# EAGLE board MP3_Shield_Panel-v14 (EAGLE 6.5.0), part 1 of 3
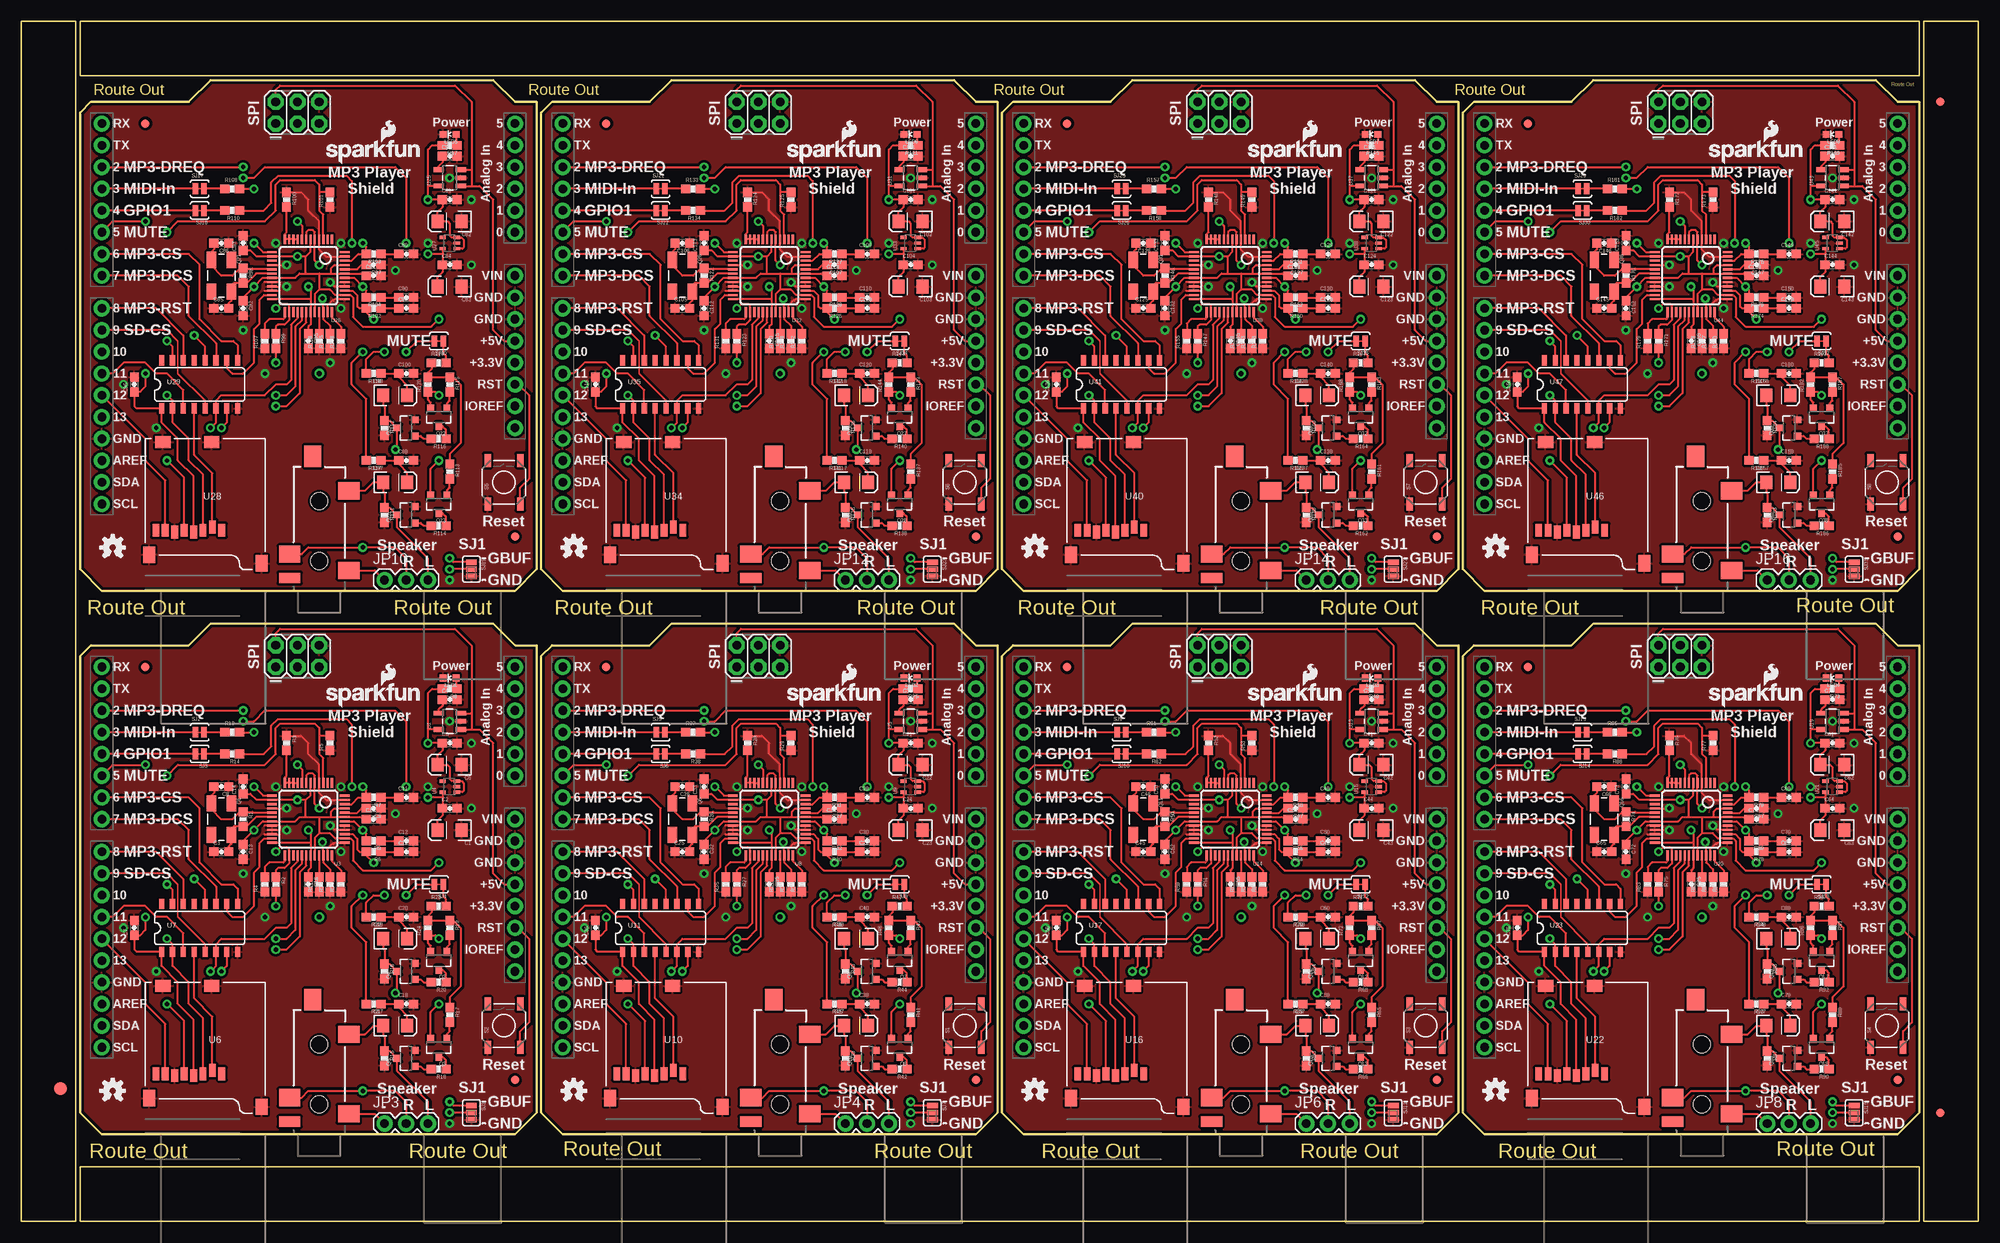
[diagram p0: board, top side]
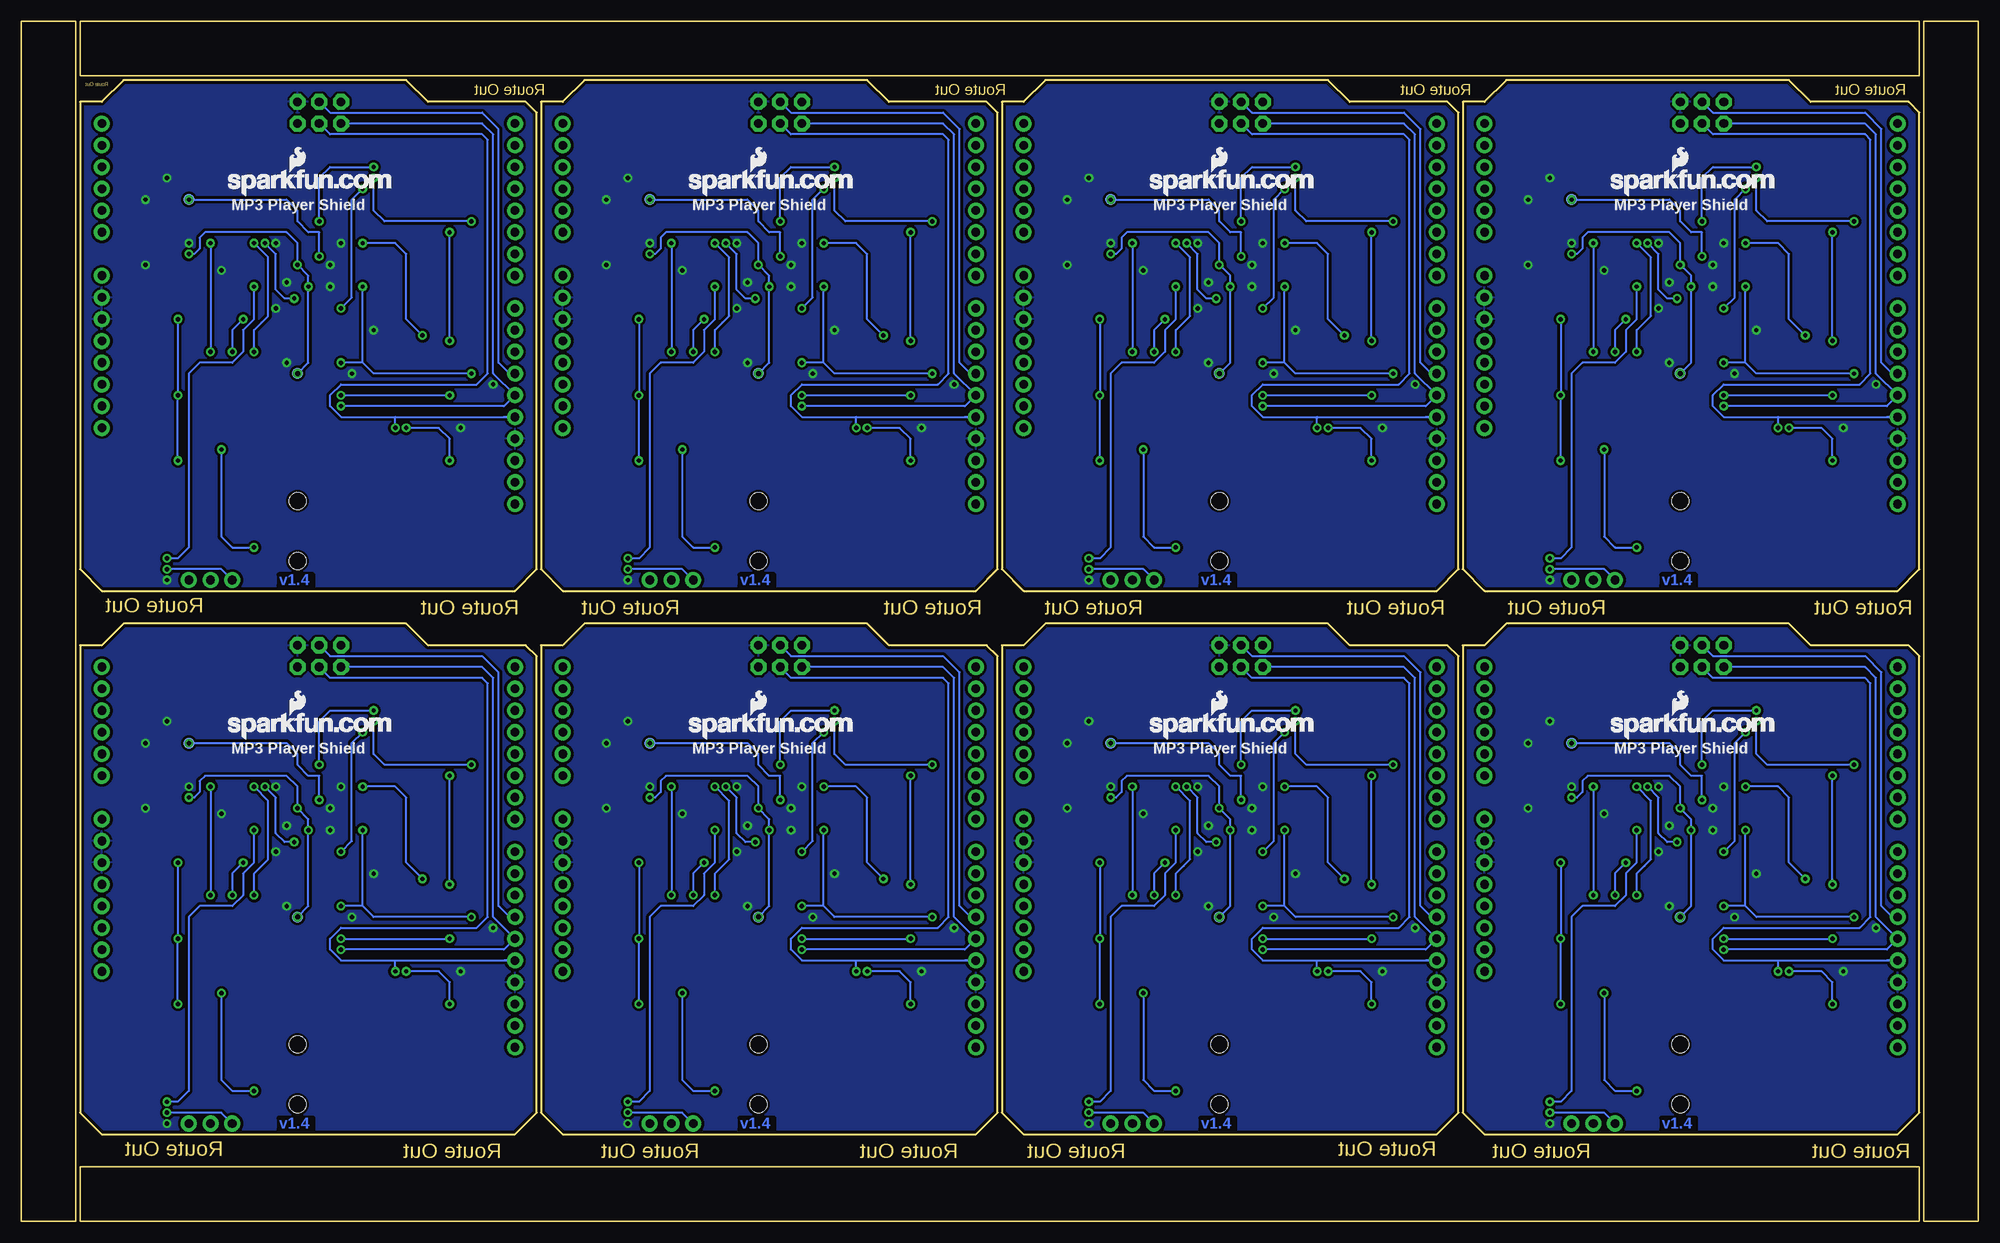
[diagram p1: board, bottom side, seen from below]

Size 228.6 x 140.21 mm. Coordinates in mm from the lower left corner, seen from the top.
Outline: 9.4,10.16 6.86,12.7 6.86,66.04 8.13,67.31 19.56,67.31 22.1,69.85 55.12,69.85 57.66,67.31 60.2,67.31 60.2,12.7 57.66,10.16 9.4,10.16
Outline: 63.25,10.16 60.71,12.7 60.71,66.04 61.98,67.31 73.41,67.31 75.95,69.85 108.97,69.85 111.51,67.31 114.05,67.31 114.05,12.7 111.51,10.16 63.25,10.16
Outline: 117.09,10.16 114.55,12.7 114.55,66.04 115.82,67.31 127.25,67.31 129.79,69.85 162.81,69.85 165.35,67.31 167.89,67.31 167.89,12.7 165.35,10.16 117.09,10.16
Outline: 170.94,10.16 168.4,12.7 168.4,66.04 169.67,67.31 181.1,67.31 183.64,69.85 216.66,69.85 219.2,67.31 221.74,67.31 221.74,12.7 219.2,10.16 170.94,10.16
Outline: 9.4,73.66 6.86,76.2 6.86,129.54 8.13,130.81 19.56,130.81 22.1,133.35 55.12,133.35 57.66,130.81 60.2,130.81 60.2,76.2 57.66,73.66 9.4,73.66
Outline: 63.25,73.66 60.71,76.2 60.71,129.54 61.98,130.81 73.41,130.81 75.95,133.35 108.97,133.35 111.51,130.81 114.05,130.81 114.05,76.2 111.51,73.66 63.25,73.66
Outline: 117.09,73.66 114.55,76.2 114.55,129.54 115.82,130.81 127.25,130.81 129.79,133.35 162.81,133.35 165.35,130.81 167.89,130.81 167.89,76.2 165.35,73.66 117.09,73.66
Outline: 170.94,73.66 168.4,76.2 168.4,129.54 169.67,130.81 181.1,130.81 183.64,133.35 216.66,133.35 219.2,130.81 221.74,130.81 221.74,76.2 219.2,73.66 170.94,73.66
Outline: 6.35,0 6.35,140.21 0,140.21 0,0 6.35,0
Outline: 6.86,6.35 6.86,0 221.74,0 221.74,6.35 6.86,6.35
Outline: 228.6,0 228.6,140.21 222.25,140.21 222.25,0 228.6,0
Outline: 221.74,133.86 221.74,140.21 6.86,140.21 6.86,133.86 221.74,133.86
Copper layers (1*16): Top 0.035mm / dielectric 1.5mm / Bottom 0.035mm
Design rules "SparkFun *": minimum track width 8mil, minimum drill 20mil, track to track 8mil, track to pad 8mil, pad to pad 8mil, via to via 8mil, smd to smd 8mil, copper to edge 10mil, drill to drill 8mil, minimum pad ring 12mil, minimum via ring 10mil, stop-mask expansion 4mil, vias tented up to drill 20mil, thermal gap 10mil

## Footprints (pad centres in the part's own frame; a part is rotated, then mirrored left to right if it is on the bottom)
EIA3216 = smd 1.4 x 1.6: A 1.4,0; C -1.4,0
0603-CAP = smd 1.1 x 1: 1 -0.85,0; 2 0.85,0
FIDUCIAL-1.5X3 = smd 1.5 x 1.5: 1 0,0
FIDUCIAL-1X2 = smd 1 x 1: 1 0,0
2X3 = drill 1.016 pad 1.88 octagon: 1 0,0; 2 0,2.54; 3 2.54,0; 4 2.54,2.54; 5 5.08,0; 6 5.08,2.54
AUDIO-JACK-3.5MM-SMD = smd 2 x 2.5: RING 4.3,3.45; SLEEVE 2.4,-3.45; TIP 11.7,-3.45 | smd 1.2 x 2.5: RSH 1.5,3.45 | smd 2.5 x 2: TSH 15.75,0.75 | hole 2: 3.5,0; 10.5,0
1X03 = drill 1.016 pad 1.88: 1 0,0; 2 2.54,0; 3 5.08,0
LED-0603 = smd 0.8 x 0.8: A 0,-0.75; C 0,0.75
CRYSTAL-SMD-5X3 = smd 1.9 x 1.1: 1 -1.85,-1.15; 2 1.85,-1.15; 3 1.85,1.15; 4 -1.85,1.15
SOT23-3 = smd 0.8 x 0.9: 1 -0.95,-1; 2 0.95,-1; 3 0,1.1
0603-RES = smd 1.1 x 1: 1 -0.85,0; 2 0.85,0
TACTILE_SWITCH_SMD = smd 1.524 x 0.762: 1 -2.54,1.905; 2 2.54,1.905; 3 -2.54,-1.905; 4 2.54,-1.905
SJ_3_PASTE2&3 = smd 0.635 x 1.27: 1 -0.813,0; 2 0,0; 3 0.813,0
SJ_2S-TRACE = smd 0.635 x 1.27: 1 -0.508,0; 2 0.508,0
PAD.03X.05 = smd 1.27 x 1.27: P$1 0,0
SOT23-5 = smd 0.55 x 1.2: 1 -0.95,-1.3; 2 0,-1.3; 3 0.95,-1.3; 4 0.95,1.3; 5 -0.95,1.3
UNO_R3_SHIELD = drill 1.016 pad 1.88: 3.3V 50.8,26.67; 5V 50.8,29.21; A0 50.8,41.91; A1 50.8,44.45; A2 50.8,46.99; A3 50.8,49.53; A4 50.8,52.07; A5 50.8,54.61; AREF 2.54,15.24; D2 2.54,49.53; D3 2.54,46.99; D4 2.54,44.45; D5 2.54,41.91; D6 2.54,39.37; D7 2.54,36.83; D8 2.54,33.02; D9 2.54,30.48; D10 2.54,27.94; D11 2.54,25.4; D12 2.54,22.86; D13 2.54,20.32; GND@0 50.8,31.75; GND@1 50.8,34.29; GND@2 2.54,17.78; IOREF 50.8,21.59; NC 50.8,19.05; RES 50.8,24.13; RX 2.54,54.61; SCL 2.54,10.16; SDA 2.54,12.7; TX 2.54,52.07; VIN 50.8,36.83
LQFP-48 = smd 0.254 x 1.143: 1 -2.75,-4.25; 2 -2.25,-4.25; 3 -1.75,-4.25; 4 -1.25,-4.25; 5 -0.75,-4.25; 6 -0.25,-4.25; 7 0.25,-4.25; 8 0.75,-4.25; 9 1.25,-4.25; 10 1.75,-4.25; 11 2.25,-4.25; 12 2.75,-4.25; 25 2.75,4.25; 26 2.25,4.25; 27 1.75,4.25; 28 1.25,4.25; 29 0.75,4.25; 30 0.25,4.25; 31 -0.25,4.25; 32 -0.75,4.25; 33 -1.25,4.25; 34 -1.75,4.25; 35 -2.25,4.25; 36 -2.75,4.25 | smd 1.143 x 0.254: 13 4.25,-2.75; 14 4.25,-2.25; 15 4.25,-1.75; 16 4.25,-1.25; 17 4.25,-0.75; 18 4.25,-0.25; 19 4.25,0.25; 20 4.25,0.75; 21 4.25,1.25; 22 4.25,1.75; 23 4.25,2.25; 24 4.25,2.75; 37 -4.25,2.75; 38 -4.25,2.25; 39 -4.25,1.75; 40 -4.25,1.25; 41 -4.25,0.75; 42 -4.25,0.25; 43 -4.25,-0.25; 44 -4.25,-0.75; 45 -4.25,-1.25; 46 -4.25,-1.75; 47 -4.25,-2.25; 48 -4.25,-2.75
SC70 = smd 0.4 x 0.75: 1 -0.65,-0.825; 2 0,-0.825; 3 0.65,-0.825; 4 0.65,0.825; 5 -0.65,0.825
MICRO-SD-SOCKET-PP = smd 0.8 x 1.5: 1 -8.94,10.7; 2 -7.84,10.3; 3 -6.74,10.7; 4 -5.64,10.9; 5 -4.54,10.7; 6 -3.44,10.9; 7 -2.34,10.7; 8 -1.24,10.7 | smd 1.8 x 1.4: CD1 -2.05,0.4; CD2 -7.75,0.4 | smd 1.4 x 1.9: GND1 -13.6,14.55; GND3 -0.45,13.55
SO016 = smd 0.6 x 1.2: 1 -4.445,-2.8; 2 -3.175,-2.8; 3 -1.905,-2.8; 4 -0.635,-2.8; 5 0.635,-2.8; 6 1.905,-2.8; 7 3.175,-2.8; 8 4.445,-2.8; 9 4.445,2.8; 10 3.175,2.8; 11 1.905,2.8; 12 0.635,2.8; 13 -0.635,2.8; 14 -1.905,2.8; 15 -3.175,2.8; 16 -4.445,2.8

## Placement (x,y rotation side)
C1  10uF  [EIA3216]  50.04,45.72 180 top
C2  0.1uF  [0603-CAP]  50.04,48.26 0 top
C3  22pF  [0603-CAP]  23.37,43.18 0 top
C4  470pF  [0603-CAP]  50.04,60.96 0 top
C5  0.1uF  [0603-CAP]  50.04,55.88 0 top
C6  10uF  [EIA3216]  50.04,53.34 180 top
C7  0.1uF  [0603-CAP]  13.21,34.29 90 top
C8  22pF  [0603-CAP]  23.37,50.8 180 top
C9  1.0uF  [0603-CAP]  41.15,48.26 180 top
C10  10nF  [0603-CAP]  44.96,43.18 0 top
C11  10nF  [0603-CAP]  44.96,49.53 0 top
C12  47nF  [0603-CAP]  44.96,44.45 0 top
C13  0.1uF  [0603-CAP]  25.91,43.18 270 top
C14  0.1uF  [0603-CAP]  25.91,50.8 90 top
C15  0.1uF  [0603-CAP]  41.15,46.99 0 top
C16  0.1uF  [0603-CAP]  33.53,39.37 270 top
C17  10uF  [EIA3216]  43.69,22.86 0 top
C18  10uF  [EIA3216]  43.69,33.02 0 top
C19  3.3nF  [0603-CAP]  44.96,25.4 0 top
C20  3.3nF  [0603-CAP]  44.96,35.56 0 top
C21  0.1uF  [0603-CAP]  103.89,55.88 0 top
C22  10uF  [EIA3216]  103.89,53.34 180 top
C23  10uF  [EIA3216]  103.89,45.72 180 top
C24  0.1uF  [0603-CAP]  103.89,48.26 0 top
C25  22pF  [0603-CAP]  77.22,43.18 0 top
C26  22pF  [0603-CAP]  77.22,50.8 180 top
C27  1.0uF  [0603-CAP]  95,48.26 180 top
C28  10nF  [0603-CAP]  98.81,43.18 0 top
C29  10nF  [0603-CAP]  98.81,49.53 0 top
C30  47nF  [0603-CAP]  98.81,44.45 0 top
C31  470pF  [0603-CAP]  103.89,60.96 0 top
C32  0.1uF  [0603-CAP]  79.76,43.18 270 top
C33  0.1uF  [0603-CAP]  79.76,50.8 90 top
C34  0.1uF  [0603-CAP]  95,46.99 0 top
C35  0.1uF  [0603-CAP]  87.38,39.37 270 top
C36  0.1uF  [0603-CAP]  67.06,34.29 90 top
C37  10uF  [EIA3216]  97.54,22.86 0 top
C38  10uF  [EIA3216]  97.54,33.02 0 top
C39  3.3nF  [0603-CAP]  98.81,25.4 0 top
C40  3.3nF  [0603-CAP]  98.81,35.56 0 top
C41  0.1uF  [0603-CAP]  157.73,55.88 0 top
C42  10uF  [EIA3216]  157.73,53.34 180 top
C43  10uF  [EIA3216]  157.73,45.72 180 top
C44  0.1uF  [0603-CAP]  157.73,48.26 0 top
C45  22pF  [0603-CAP]  131.06,43.18 0 top
C46  22pF  [0603-CAP]  131.06,50.8 180 top
C47  1.0uF  [0603-CAP]  148.84,48.26 180 top
C48  10nF  [0603-CAP]  152.65,43.18 0 top
C49  10nF  [0603-CAP]  152.65,49.53 0 top
C50  47nF  [0603-CAP]  152.65,44.45 0 top
C51  470pF  [0603-CAP]  157.73,60.96 0 top
C52  0.1uF  [0603-CAP]  133.6,43.18 270 top
C53  0.1uF  [0603-CAP]  133.6,50.8 90 top
C54  0.1uF  [0603-CAP]  148.84,46.99 0 top
C55  0.1uF  [0603-CAP]  141.22,39.37 270 top
C56  0.1uF  [0603-CAP]  120.9,34.29 90 top
C57  10uF  [EIA3216]  151.38,22.86 0 top
C58  10uF  [EIA3216]  151.38,33.02 0 top
C59  3.3nF  [0603-CAP]  152.65,25.4 0 top
C60  3.3nF  [0603-CAP]  152.65,35.56 0 top
C61  0.1uF  [0603-CAP]  211.58,55.88 0 top
C62  10uF  [EIA3216]  211.58,53.34 180 top
C63  10uF  [EIA3216]  211.58,45.72 180 top
C64  0.1uF  [0603-CAP]  211.58,48.26 0 top
C65  22pF  [0603-CAP]  184.91,43.18 0 top
C66  22pF  [0603-CAP]  184.91,50.8 180 top
C67  1.0uF  [0603-CAP]  202.69,48.26 180 top
C68  10nF  [0603-CAP]  206.5,43.18 0 top
C69  10nF  [0603-CAP]  206.5,49.53 0 top
C70  47nF  [0603-CAP]  206.5,44.45 0 top
C71  470pF  [0603-CAP]  211.58,60.96 0 top
C72  0.1uF  [0603-CAP]  187.45,43.18 270 top
C73  0.1uF  [0603-CAP]  187.45,50.8 90 top
C74  0.1uF  [0603-CAP]  202.69,46.99 0 top
C75  0.1uF  [0603-CAP]  195.07,39.37 270 top
C76  0.1uF  [0603-CAP]  174.75,34.29 90 top
C77  10uF  [EIA3216]  205.23,22.86 0 top
C78  10uF  [EIA3216]  205.23,33.02 0 top
C79  3.3nF  [0603-CAP]  206.5,25.4 0 top
C80  3.3nF  [0603-CAP]  206.5,35.56 0 top
C81  0.1uF  [0603-CAP]  50.04,119.38 0 top
C82  10uF  [EIA3216]  50.04,116.84 180 top
C83  10uF  [EIA3216]  50.04,109.22 180 top
C84  0.1uF  [0603-CAP]  50.04,111.76 0 top
C85  22pF  [0603-CAP]  23.37,106.68 0 top
C86  22pF  [0603-CAP]  23.37,114.3 180 top
C87  1.0uF  [0603-CAP]  41.15,111.76 180 top
C88  10nF  [0603-CAP]  44.96,106.68 0 top
C89  10nF  [0603-CAP]  44.96,113.03 0 top
C90  47nF  [0603-CAP]  44.96,107.95 0 top
C91  470pF  [0603-CAP]  50.04,124.46 0 top
C92  0.1uF  [0603-CAP]  25.91,106.68 270 top
C93  0.1uF  [0603-CAP]  25.91,114.3 90 top
C94  0.1uF  [0603-CAP]  41.15,110.49 0 top
C95  0.1uF  [0603-CAP]  33.53,102.87 270 top
C96  0.1uF  [0603-CAP]  13.21,97.79 90 top
C97  10uF  [EIA3216]  43.69,86.36 0 top
C98  10uF  [EIA3216]  43.69,96.52 0 top
C99  3.3nF  [0603-CAP]  44.96,88.9 0 top
C100  3.3nF  [0603-CAP]  44.96,99.06 0 top
C101  0.1uF  [0603-CAP]  103.89,119.38 0 top
C102  10uF  [EIA3216]  103.89,116.84 180 top
C103  10uF  [EIA3216]  103.89,109.22 180 top
C104  0.1uF  [0603-CAP]  103.89,111.76 0 top
C105  22pF  [0603-CAP]  77.22,106.68 0 top
C106  22pF  [0603-CAP]  77.22,114.3 180 top
C107  1.0uF  [0603-CAP]  95,111.76 180 top
C108  10nF  [0603-CAP]  98.81,106.68 0 top
C109  10nF  [0603-CAP]  98.81,113.03 0 top
C110  47nF  [0603-CAP]  98.81,107.95 0 top
C111  470pF  [0603-CAP]  103.89,124.46 0 top
C112  0.1uF  [0603-CAP]  79.76,106.68 270 top
C113  0.1uF  [0603-CAP]  79.76,114.3 90 top
C114  0.1uF  [0603-CAP]  95,110.49 0 top
C115  0.1uF  [0603-CAP]  87.38,102.87 270 top
C116  0.1uF  [0603-CAP]  67.06,97.79 90 top
C117  10uF  [EIA3216]  97.54,86.36 0 top
C118  10uF  [EIA3216]  97.54,96.52 0 top
C119  3.3nF  [0603-CAP]  98.81,88.9 0 top
C120  3.3nF  [0603-CAP]  98.81,99.06 0 top
C121  0.1uF  [0603-CAP]  157.73,119.38 0 top
C122  10uF  [EIA3216]  157.73,116.84 180 top
C123  10uF  [EIA3216]  157.73,109.22 180 top
C124  0.1uF  [0603-CAP]  157.73,111.76 0 top
C125  22pF  [0603-CAP]  131.06,106.68 0 top
C126  22pF  [0603-CAP]  131.06,114.3 180 top
C127  1.0uF  [0603-CAP]  148.84,111.76 180 top
C128  10nF  [0603-CAP]  152.65,106.68 0 top
C129  10nF  [0603-CAP]  152.65,113.03 0 top
C130  47nF  [0603-CAP]  152.65,107.95 0 top
C131  470pF  [0603-CAP]  157.73,124.46 0 top
C132  0.1uF  [0603-CAP]  133.6,106.68 270 top
C133  0.1uF  [0603-CAP]  133.6,114.3 90 top
C134  0.1uF  [0603-CAP]  148.84,110.49 0 top
C135  0.1uF  [0603-CAP]  141.22,102.87 270 top
C136  0.1uF  [0603-CAP]  120.9,97.79 90 top
C137  10uF  [EIA3216]  151.38,86.36 0 top
C138  10uF  [EIA3216]  151.38,96.52 0 top
C139  3.3nF  [0603-CAP]  152.65,88.9 0 top
C140  3.3nF  [0603-CAP]  152.65,99.06 0 top
C141  0.1uF  [0603-CAP]  211.58,119.38 0 top
C142  10uF  [EIA3216]  211.58,116.84 180 top
C143  10uF  [EIA3216]  211.58,109.22 180 top
C144  0.1uF  [0603-CAP]  211.58,111.76 0 top
C145  22pF  [0603-CAP]  184.91,106.68 0 top
C146  22pF  [0603-CAP]  184.91,114.3 180 top
C147  1.0uF  [0603-CAP]  202.69,111.76 180 top
C148  10nF  [0603-CAP]  206.5,106.68 0 top
C149  10nF  [0603-CAP]  206.5,113.03 0 top
C150  47nF  [0603-CAP]  206.5,107.95 0 top
C151  470pF  [0603-CAP]  211.58,124.46 0 top
C152  0.1uF  [0603-CAP]  187.45,106.68 270 top
C153  0.1uF  [0603-CAP]  187.45,114.3 90 top
C154  0.1uF  [0603-CAP]  202.69,110.49 0 top
C155  0.1uF  [0603-CAP]  195.07,102.87 270 top
C156  0.1uF  [0603-CAP]  174.75,97.79 90 top
C157  10uF  [EIA3216]  205.23,86.36 0 top
C158  10uF  [EIA3216]  205.23,96.52 0 top
C159  3.3nF  [0603-CAP]  206.5,88.9 0 top
C160  3.3nF  [0603-CAP]  206.5,99.06 0 top
E$1  [FIDUCIAL-1.5X3]  4.57,15.49 0 top
E$4  [FIDUCIAL-1X2]  224.16,12.7 0 top
E$5  [FIDUCIAL-1X2]  224.16,130.81 180 top
J1  ISP/SPI  [2X3]  29.72,64.77 0 top
J2  ISP/SPI  [2X3]  83.57,64.77 0 top
J3  ISP/SPI  [2X3]  137.41,64.77 0 top
J4  ISP/SPI  [2X3]  191.26,64.77 0 top
J5  ISP/SPI  [2X3]  29.72,128.27 0 top
J6  ISP/SPI  [2X3]  83.57,128.27 0 top
J7  ISP/SPI  [2X3]  137.41,128.27 0 top
J8  ISP/SPI  [2X3]  191.26,128.27 0 top
JP1  [AUDIO-JACK-3.5MM-SMD]  34.8,10.16 90 top
JP2  [AUDIO-JACK-3.5MM-SMD]  88.65,10.16 90 top
JP3  Optional  [1X03]  42.42,11.43 0 top
JP4  Optional  [1X03]  96.27,11.43 0 top
JP5  [AUDIO-JACK-3.5MM-SMD]  142.49,10.16 90 top
JP6  Optional  [1X03]  150.11,11.43 0 top
JP7  [AUDIO-JACK-3.5MM-SMD]  196.34,10.16 90 top
JP8  Optional  [1X03]  203.96,11.43 0 top
JP9  [AUDIO-JACK-3.5MM-SMD]  34.8,73.66 90 top
JP10  Optional  [1X03]  42.42,74.93 0 top
JP11  [AUDIO-JACK-3.5MM-SMD]  88.65,73.66 90 top
JP12  Optional  [1X03]  96.27,74.93 0 top
JP13  [AUDIO-JACK-3.5MM-SMD]  142.49,73.66 90 top
JP14  Optional  [1X03]  150.11,74.93 0 top
JP15  [AUDIO-JACK-3.5MM-SMD]  196.34,73.66 90 top
JP16  Optional  [1X03]  203.96,74.93 0 top
LED1  Power  [LED-0603]  50.04,63.5 90 top
LED2  Power  [LED-0603]  103.89,63.5 90 top
LED3  Power  [LED-0603]  157.73,63.5 90 top
LED4  Power  [LED-0603]  211.58,63.5 90 top
LED5  Power  [LED-0603]  50.04,127 90 top
LED6  Power  [LED-0603]  103.89,127 90 top
LED7  Power  [LED-0603]  157.73,127 90 top
LED8  Power  [LED-0603]  211.58,127 90 top
LOGO1  OSHW-LOGOS  [OSHW-LOGO-S]  10.67,15.24 0 top
LOGO2  SFE_LOGO_NAME_FLAME.1_INCH  [SFE_LOGO_NAME_FLAME_.1]  35.18,59.94 0 top
LOGO3  OSHW-LOGOS  [OSHW-LOGO-S]  64.52,15.24 0 top
LOGO4  SFE_LOGO_NAME_FLAME.1_INCH  [SFE_LOGO_NAME_FLAME_.1]  89.03,59.94 0 top
LOGO5  OSHW-LOGOS  [OSHW-LOGO-S]  118.36,15.24 0 top
LOGO6  SFE_LOGO_NAME_FLAME.1_INCH  [SFE_LOGO_NAME_FLAME_.1]  142.88,59.94 0 top
LOGO7  OSHW-LOGOS  [OSHW-LOGO-S]  172.21,15.24 0 top
LOGO8  SFE_LOGO_NAME_FLAME.1_INCH  [SFE_LOGO_NAME_FLAME_.1]  196.72,59.94 0 top
LOGO9  OSHW-LOGOS  [OSHW-LOGO-S]  10.67,78.74 0 top
LOGO10  SFE_LOGO_NAME_FLAME.1_INCH  [SFE_LOGO_NAME_FLAME_.1]  35.18,123.44 0 top
LOGO11  OSHW-LOGOS  [OSHW-LOGO-S]  64.52,78.74 0 top
LOGO12  SFE_LOGO_NAME_FLAME.1_INCH  [SFE_LOGO_NAME_FLAME_.1]  89.03,123.44 0 top
LOGO13  OSHW-LOGOS  [OSHW-LOGO-S]  118.36,78.74 0 top
LOGO14  SFE_LOGO_NAME_FLAME.1_INCH  [SFE_LOGO_NAME_FLAME_.1]  142.88,123.44 0 top
LOGO15  OSHW-LOGOS  [OSHW-LOGO-S]  172.21,78.74 0 top
LOGO16  SFE_LOGO_NAME_FLAME.1_INCH  [SFE_LOGO_NAME_FLAME_.1]  196.72,123.44 0 top
Q1  12.288MHz  [CRYSTAL-SMD-5X3]  23.37,46.99 270 top
Q2  PMBT3906  [SOT23-3]  48.77,30.48 180 top
Q3  PMBT3906  [SOT23-3]  48.77,20.32 180 top
Q4  MMBT2222A  [SOT23-3]  44.96,29.21 90 top
Q5  MMBT2222A  [SOT23-3]  44.96,19.05 90 top
Q6  12.288MHz  [CRYSTAL-SMD-5X3]  77.22,46.99 270 top
Q7  PMBT3906  [SOT23-3]  102.62,30.48 180 top
Q8  PMBT3906  [SOT23-3]  102.62,20.32 180 top
Q9  MMBT2222A  [SOT23-3]  98.81,29.21 90 top
Q10  MMBT2222A  [SOT23-3]  98.81,19.05 90 top
Q11  12.288MHz  [CRYSTAL-SMD-5X3]  131.06,46.99 270 top
Q12  PMBT3906  [SOT23-3]  156.46,30.48 180 top
Q13  PMBT3906  [SOT23-3]  156.46,20.32 180 top
Q14  MMBT2222A  [SOT23-3]  152.65,29.21 90 top
Q15  MMBT2222A  [SOT23-3]  152.65,19.05 90 top
Q16  12.288MHz  [CRYSTAL-SMD-5X3]  184.91,46.99 270 top
Q17  PMBT3906  [SOT23-3]  210.31,30.48 180 top
Q18  PMBT3906  [SOT23-3]  210.31,20.32 180 top
Q19  MMBT2222A  [SOT23-3]  206.5,29.21 90 top
Q20  MMBT2222A  [SOT23-3]  206.5,19.05 90 top
Q21  12.288MHz  [CRYSTAL-SMD-5X3]  23.37,110.49 270 top
Q22  PMBT3906  [SOT23-3]  48.77,93.98 180 top
Q23  PMBT3906  [SOT23-3]  48.77,83.82 180 top
Q24  MMBT2222A  [SOT23-3]  44.96,92.71 90 top
Q25  MMBT2222A  [SOT23-3]  44.96,82.55 90 top
Q26  12.288MHz  [CRYSTAL-SMD-5X3]  77.22,110.49 270 top
Q27  PMBT3906  [SOT23-3]  102.62,93.98 180 top
Q28  PMBT3906  [SOT23-3]  102.62,83.82 180 top
Q29  MMBT2222A  [SOT23-3]  98.81,92.71 90 top
Q30  MMBT2222A  [SOT23-3]  98.81,82.55 90 top
Q31  12.288MHz  [CRYSTAL-SMD-5X3]  131.06,110.49 270 top
Q32  PMBT3906  [SOT23-3]  156.46,93.98 180 top
Q33  PMBT3906  [SOT23-3]  156.46,83.82 180 top
Q34  MMBT2222A  [SOT23-3]  152.65,92.71 90 top
Q35  MMBT2222A  [SOT23-3]  152.65,82.55 90 top
Q36  12.288MHz  [CRYSTAL-SMD-5X3]  184.91,110.49 270 top
Q37  PMBT3906  [SOT23-3]  210.31,93.98 180 top
Q38  PMBT3906  [SOT23-3]  210.31,83.82 180 top
Q39  MMBT2222A  [SOT23-3]  206.5,92.71 90 top
Q40  MMBT2222A  [SOT23-3]  206.5,82.55 90 top
R1  1M  [0603-RES]  25.91,46.99 270 top
R2  100k  [0603-RES]  29.72,39.37 270 top
R3  100k  [0603-RES]  30.99,55.88 270 top
R4  100k  [0603-RES]  28.45,39.37 90 top
R5  100k  [0603-RES]  36.07,55.88 90 top
R6  20  [0603-RES]  41.15,43.18 180 top
R7  20  [0603-RES]  41.15,49.53 180 top
R8  330  [0603-RES]  50.04,62.23 180 top
R9  10  [0603-RES]  41.15,44.45 180 top
R10  100k  [0603-RES]  36.07,39.37 90 top
R11  100k  [0603-RES]  34.8,39.37 90 top
R12  100k  [0603-RES]  37.34,39.37 90 top
R13  1K  [0603-RES]  24.64,57.15 0 top
R14  1K  [0603-RES]  24.64,54.61 180 top
R15  10K  [0603-RES]  42.42,19.05 270 top
R16  10K  [0603-RES]  42.42,29.21 270 top
R17  10K  [0603-RES]  50.04,24.13 270 top
R18  10K  [0603-RES]  48.77,17.78 180 top
R19  10K  [0603-RES]  50.04,34.29 270 top
R20  10K  [0603-RES]  48.77,27.94 180 top
R21  470  [0603-RES]  41.15,25.4 180 top
R22  470  [0603-RES]  41.15,35.56 180 top
R23  1K  [0603-RES]  48.77,36.83 0 top
R24  100K  [0603-RES]  47.5,34.29 90 top
R25  330  [0603-RES]  103.89,62.23 180 top
R26  1M  [0603-RES]  79.76,46.99 270 top
R27  100k  [0603-RES]  83.57,39.37 270 top
R28  100k  [0603-RES]  84.84,55.88 270 top
R29  100k  [0603-RES]  89.92,55.88 90 top
R30  20  [0603-RES]  95,43.18 180 top
R31  20  [0603-RES]  95,49.53 180 top
R32  10  [0603-RES]  95,44.45 180 top
R33  100k  [0603-RES]  89.92,39.37 90 top
R34  100k  [0603-RES]  88.65,39.37 90 top
R35  100k  [0603-RES]  82.3,39.37 90 top
R36  100k  [0603-RES]  91.19,39.37 90 top
R37  1K  [0603-RES]  78.49,57.15 0 top
R38  1K  [0603-RES]  78.49,54.61 180 top
R39  10K  [0603-RES]  96.27,19.05 270 top
R40  10K  [0603-RES]  96.27,29.21 270 top
R41  10K  [0603-RES]  103.89,24.13 270 top
R42  10K  [0603-RES]  102.62,17.78 180 top
R43  10K  [0603-RES]  103.89,34.29 270 top
R44  10K  [0603-RES]  102.62,27.94 180 top
R45  470  [0603-RES]  95,25.4 180 top
R46  470  [0603-RES]  95,35.56 180 top
R47  1K  [0603-RES]  102.62,36.83 0 top
R48  100K  [0603-RES]  101.35,34.29 90 top
R49  330  [0603-RES]  157.73,62.23 180 top
R50  1M  [0603-RES]  133.6,46.99 270 top
R51  100k  [0603-RES]  137.41,39.37 270 top
R52  100k  [0603-RES]  138.68,55.88 270 top
R53  100k  [0603-RES]  143.76,55.88 90 top
R54  20  [0603-RES]  148.84,43.18 180 top
R55  20  [0603-RES]  148.84,49.53 180 top
R56  10  [0603-RES]  148.84,44.45 180 top
R57  100k  [0603-RES]  143.76,39.37 90 top
R58  100k  [0603-RES]  142.49,39.37 90 top
R59  100k  [0603-RES]  136.14,39.37 90 top
R60  100k  [0603-RES]  145.03,39.37 90 top
R61  1K  [0603-RES]  132.33,57.15 0 top
R62  1K  [0603-RES]  132.33,54.61 180 top
R63  10K  [0603-RES]  150.11,19.05 270 top
R64  10K  [0603-RES]  150.11,29.21 270 top
R65  10K  [0603-RES]  157.73,24.13 270 top
R66  10K  [0603-RES]  156.46,17.78 180 top
R67  10K  [0603-RES]  157.73,34.29 270 top
R68  10K  [0603-RES]  156.46,27.94 180 top
R69  470  [0603-RES]  148.84,25.4 180 top
R70  470  [0603-RES]  148.84,35.56 180 top
R71  1K  [0603-RES]  156.46,36.83 0 top
R72  100K  [0603-RES]  155.19,34.29 90 top
R73  330  [0603-RES]  211.58,62.23 180 top
R74  1M  [0603-RES]  187.45,46.99 270 top
R75  100k  [0603-RES]  191.26,39.37 270 top
R76  100k  [0603-RES]  192.53,55.88 270 top
R77  100k  [0603-RES]  197.61,55.88 90 top
R78  20  [0603-RES]  202.69,43.18 180 top
R79  20  [0603-RES]  202.69,49.53 180 top
R80  10  [0603-RES]  202.69,44.45 180 top
R81  100k  [0603-RES]  197.61,39.37 90 top
R82  100k  [0603-RES]  196.34,39.37 90 top
R83  100k  [0603-RES]  189.99,39.37 90 top
R84  100k  [0603-RES]  198.88,39.37 90 top
R85  1K  [0603-RES]  186.18,57.15 0 top
R86  1K  [0603-RES]  186.18,54.61 180 top
R87  10K  [0603-RES]  203.96,19.05 270 top
R88  10K  [0603-RES]  203.96,29.21 270 top
R89  10K  [0603-RES]  211.58,24.13 270 top
R90  10K  [0603-RES]  210.31,17.78 180 top
R91  10K  [0603-RES]  211.58,34.29 270 top
R92  10K  [0603-RES]  210.31,27.94 180 top
R93  470  [0603-RES]  202.69,25.4 180 top
R94  470  [0603-RES]  202.69,35.56 180 top
R95  1K  [0603-RES]  210.31,36.83 0 top
R96  100K  [0603-RES]  209.04,34.29 90 top
R97  330  [0603-RES]  50.04,125.73 180 top
R98  1M  [0603-RES]  25.91,110.49 270 top
R99  100k  [0603-RES]  29.72,102.87 270 top
R100  100k  [0603-RES]  30.99,119.38 270 top
R101  100k  [0603-RES]  36.07,119.38 90 top
R102  20  [0603-RES]  41.15,106.68 180 top
R103  20  [0603-RES]  41.15,113.03 180 top
R104  10  [0603-RES]  41.15,107.95 180 top
R105  100k  [0603-RES]  36.07,102.87 90 top
R106  100k  [0603-RES]  34.8,102.87 90 top
R107  100k  [0603-RES]  28.45,102.87 90 top
R108  100k  [0603-RES]  37.34,102.87 90 top
R109  1K  [0603-RES]  24.64,120.65 0 top
R110  1K  [0603-RES]  24.64,118.11 180 top
R111  10K  [0603-RES]  42.42,82.55 270 top
R112  10K  [0603-RES]  42.42,92.71 270 top
R113  10K  [0603-RES]  50.04,87.63 270 top
R114  10K  [0603-RES]  48.77,81.28 180 top
R115  10K  [0603-RES]  50.04,97.79 270 top
R116  10K  [0603-RES]  48.77,91.44 180 top
R117  470  [0603-RES]  41.15,88.9 180 top
R118  470  [0603-RES]  41.15,99.06 180 top
R119  1K  [0603-RES]  48.77,100.33 0 top
R120  100K  [0603-RES]  47.5,97.79 90 top
R121  330  [0603-RES]  103.89,125.73 180 top
R122  1M  [0603-RES]  79.76,110.49 270 top
R123  100k  [0603-RES]  83.57,102.87 270 top
R124  100k  [0603-RES]  84.84,119.38 270 top
R125  100k  [0603-RES]  89.92,119.38 90 top
R126  20  [0603-RES]  95,106.68 180 top
R127  20  [0603-RES]  95,113.03 180 top
R128  10  [0603-RES]  95,107.95 180 top
R129  100k  [0603-RES]  89.92,102.87 90 top
R130  100k  [0603-RES]  88.65,102.87 90 top
R131  100k  [0603-RES]  82.3,102.87 90 top
R132  100k  [0603-RES]  91.19,102.87 90 top
R133  1K  [0603-RES]  78.49,120.65 0 top
R134  1K  [0603-RES]  78.49,118.11 180 top
R135  10K  [0603-RES]  96.27,82.55 270 top
R136  10K  [0603-RES]  96.27,92.71 270 top
R137  10K  [0603-RES]  103.89,87.63 270 top
R138  10K  [0603-RES]  102.62,81.28 180 top
R139  10K  [0603-RES]  103.89,97.79 270 top
R140  10K  [0603-RES]  102.62,91.44 180 top
R141  470  [0603-RES]  95,88.9 180 top
R142  470  [0603-RES]  95,99.06 180 top
R143  1K  [0603-RES]  102.62,100.33 0 top
R144  100K  [0603-RES]  101.35,97.79 90 top
R145  330  [0603-RES]  157.73,125.73 180 top
R146  1M  [0603-RES]  133.6,110.49 270 top
R147  100k  [0603-RES]  137.41,102.87 270 top
R148  100k  [0603-RES]  138.68,119.38 270 top
R149  100k  [0603-RES]  143.76,119.38 90 top
R150  20  [0603-RES]  148.84,106.68 180 top
R151  20  [0603-RES]  148.84,113.03 180 top
R152  10  [0603-RES]  148.84,107.95 180 top
R153  100k  [0603-RES]  143.76,102.87 90 top
R154  100k  [0603-RES]  142.49,102.87 90 top
R155  100k  [0603-RES]  136.14,102.87 90 top
R156  100k  [0603-RES]  145.03,102.87 90 top
R157  1K  [0603-RES]  132.33,120.65 0 top
R158  1K  [0603-RES]  132.33,118.11 180 top
R159  10K  [0603-RES]  150.11,82.55 270 top
R160  10K  [0603-RES]  150.11,92.71 270 top
R161  10K  [0603-RES]  157.73,87.63 270 top
R162  10K  [0603-RES]  156.46,81.28 180 top
R163  10K  [0603-RES]  157.73,97.79 270 top
R164  10K  [0603-RES]  156.46,91.44 180 top
R165  470  [0603-RES]  148.84,88.9 180 top
R166  470  [0603-RES]  148.84,99.06 180 top
R167  1K  [0603-RES]  156.46,100.33 0 top
R168  100K  [0603-RES]  155.19,97.79 90 top
R169  330  [0603-RES]  211.58,125.73 180 top
R170  1M  [0603-RES]  187.45,110.49 270 top
R171  100k  [0603-RES]  191.26,102.87 270 top
R172  100k  [0603-RES]  192.53,119.38 270 top
R173  100k  [0603-RES]  197.61,119.38 90 top
R174  20  [0603-RES]  202.69,106.68 180 top
R175  20  [0603-RES]  202.69,113.03 180 top
R176  10  [0603-RES]  202.69,107.95 180 top
R177  100k  [0603-RES]  197.61,102.87 90 top
R178  100k  [0603-RES]  196.34,102.87 90 top
R179  100k  [0603-RES]  189.99,102.87 90 top
R180  100k  [0603-RES]  198.88,102.87 90 top
R181  1K  [0603-RES]  186.18,120.65 0 top
R182  1K  [0603-RES]  186.18,118.11 180 top
R183  10K  [0603-RES]  203.96,82.55 270 top
R184  10K  [0603-RES]  203.96,92.71 270 top
R185  10K  [0603-RES]  211.58,87.63 270 top
R186  10K  [0603-RES]  210.31,81.28 180 top
R187  10K  [0603-RES]  211.58,97.79 270 top
R188  10K  [0603-RES]  210.31,91.44 180 top
R189  470  [0603-RES]  202.69,88.9 180 top
R190  470  [0603-RES]  202.69,99.06 180 top
R191  1K  [0603-RES]  210.31,100.33 0 top
R192  100K  [0603-RES]  209.04,97.79 90 top
S1  Reset  [TACTILE_SWITCH_SMD]  110.24,22.86 90 top
S2  Reset  [TACTILE_SWITCH_SMD]  56.39,22.86 90 top
S3  Reset  [TACTILE_SWITCH_SMD]  164.08,22.86 90 top
S4  Reset  [TACTILE_SWITCH_SMD]  217.93,22.86 90 top
S5  Reset  [TACTILE_SWITCH_SMD]  56.39,86.36 90 top
S6  Reset  [TACTILE_SWITCH_SMD]  110.24,86.36 90 top
S7  Reset  [TACTILE_SWITCH_SMD]  164.08,86.36 90 top
S8  Reset  [TACTILE_SWITCH_SMD]  217.93,86.36 90 top
SJ1  [SJ_3_PASTE2&3]  52.58,12.7 270 top
SJ2  NC  [SJ_2S-TRACE]  20.83,57.15 0 top
SJ3  NC  [SJ_2S-TRACE]  20.83,54.61 180 top
SJ4  NC  [SJ_2S-TRACE]  48.77,39.37 180 top
SJ5  NC  [SJ_2S-TRACE]  74.68,57.15 0 top
SJ6  NC  [SJ_2S-TRACE]  74.68,54.61 180 top
SJ7  [SJ_3_PASTE2&3]  106.43,12.7 270 top
SJ8  NC  [SJ_2S-TRACE]  102.62,39.37 180 top
SJ9  NC  [SJ_2S-TRACE]  128.52,57.15 0 top
SJ10  NC  [SJ_2S-TRACE]  128.52,54.61 180 top
SJ11  [SJ_3_PASTE2&3]  160.27,12.7 270 top
SJ12  NC  [SJ_2S-TRACE]  156.46,39.37 180 top
SJ13  NC  [SJ_2S-TRACE]  182.37,57.15 0 top
SJ14  NC  [SJ_2S-TRACE]  182.37,54.61 180 top
SJ15  [SJ_3_PASTE2&3]  214.12,12.7 270 top
SJ16  NC  [SJ_2S-TRACE]  210.31,39.37 180 top
SJ17  NC  [SJ_2S-TRACE]  20.83,120.65 0 top
SJ18  NC  [SJ_2S-TRACE]  20.83,118.11 180 top
SJ19  [SJ_3_PASTE2&3]  52.58,76.2 270 top
SJ20  NC  [SJ_2S-TRACE]  48.77,102.87 180 top
SJ21  NC  [SJ_2S-TRACE]  74.68,120.65 0 top
SJ22  NC  [SJ_2S-TRACE]  74.68,118.11 180 top
SJ23  [SJ_3_PASTE2&3]  106.43,76.2 270 top
SJ24  NC  [SJ_2S-TRACE]  102.62,102.87 180 top
SJ25  NC  [SJ_2S-TRACE]  128.52,120.65 0 top
SJ26  NC  [SJ_2S-TRACE]  128.52,118.11 180 top
SJ27  [SJ_3_PASTE2&3]  160.27,76.2 270 top
SJ28  NC  [SJ_2S-TRACE]  156.46,102.87 180 top
SJ29  NC  [SJ_2S-TRACE]  182.37,120.65 0 top
SJ30  NC  [SJ_2S-TRACE]  182.37,118.11 180 top
SJ31  [SJ_3_PASTE2&3]  214.12,76.2 270 top
SJ32  NC  [SJ_2S-TRACE]  210.31,102.87 180 top
TP1  [PAD.03X.05]  47.5,55.88 0 bottom
TP2  [PAD.03X.05]  34.8,35.56 0 bottom
TP3  [PAD.03X.05]  101.35,55.88 0 bottom
TP4  [PAD.03X.05]  88.65,35.56 0 bottom
TP5  [PAD.03X.05]  155.19,55.88 0 bottom
TP6  [PAD.03X.05]  142.49,35.56 0 bottom
TP7  [PAD.03X.05]  209.04,55.88 0 bottom
TP8  [PAD.03X.05]  196.34,35.56 0 bottom
TP9  [PAD.03X.05]  47.5,119.38 0 bottom
TP10  [PAD.03X.05]  34.8,99.06 0 bottom
TP11  [PAD.03X.05]  101.35,119.38 0 bottom
TP12  [PAD.03X.05]  88.65,99.06 0 bottom
TP13  [PAD.03X.05]  155.19,119.38 0 bottom
TP14  [PAD.03X.05]  142.49,99.06 0 bottom
TP15  [PAD.03X.05]  209.04,119.38 0 bottom
TP16  [PAD.03X.05]  196.34,99.06 0 bottom
U1  3.3V  [SOT23-5]  50.04,58.42 90 top
U2  ARDUINO_R3_SHIELD  [UNO_R3_SHIELD]  6.86,10.16 0 top
U3  VS1053  [LQFP-48]  33.53,46.99 180 top
U4  1.8V  [SC70]  50.04,50.8 90 top
U5  3.3V  [SOT23-5]  103.89,58.42 90 top
U6  USD-SOCKET  [MICRO-SD-SOCKET-PP]  14.48,27.94 180 top
U7  74HC4050 LVL CONVERTER  [SO016]  20.83,34.29 0 top
U8  VS1053  [LQFP-48]  87.38,46.99 180 top
U9  1.8V  [SC70]  103.89,50.8 90 top
U10  USD-SOCKET  [MICRO-SD-SOCKET-PP]  68.33,27.94 180 top
U11  74HC4050 LVL CONVERTER  [SO016]  74.68,34.29 0 top
U12  ARDUINO_R3_SHIELD  [UNO_R3_SHIELD]  60.71,10.16 0 top
U13  3.3V  [SOT23-5]  157.73,58.42 90 top
U14  VS1053  [LQFP-48]  141.22,46.99 180 top
U15  1.8V  [SC70]  157.73,50.8 90 top
U16  USD-SOCKET  [MICRO-SD-SOCKET-PP]  122.17,27.94 180 top
U17  74HC4050 LVL CONVERTER  [SO016]  128.52,34.29 0 top
U18  ARDUINO_R3_SHIELD  [UNO_R3_SHIELD]  114.55,10.16 0 top
U19  3.3V  [SOT23-5]  211.58,58.42 90 top
U20  VS1053  [LQFP-48]  195.07,46.99 180 top
U21  1.8V  [SC70]  211.58,50.8 90 top
U22  USD-SOCKET  [MICRO-SD-SOCKET-PP]  176.02,27.94 180 top
U23  74HC4050 LVL CONVERTER  [SO016]  182.37,34.29 0 top
U24  ARDUINO_R3_SHIELD  [UNO_R3_SHIELD]  168.4,10.16 0 top
U25  3.3V  [SOT23-5]  50.04,121.92 90 top
U26  VS1053  [LQFP-48]  33.53,110.49 180 top
U27  1.8V  [SC70]  50.04,114.3 90 top
U28  USD-SOCKET  [MICRO-SD-SOCKET-PP]  14.48,91.44 180 top
U29  74HC4050 LVL CONVERTER  [SO016]  20.83,97.79 0 top
U30  ARDUINO_R3_SHIELD  [UNO_R3_SHIELD]  6.86,73.66 0 top
U31  3.3V  [SOT23-5]  103.89,121.92 90 top
U32  VS1053  [LQFP-48]  87.38,110.49 180 top
U33  1.8V  [SC70]  103.89,114.3 90 top
U34  USD-SOCKET  [MICRO-SD-SOCKET-PP]  68.33,91.44 180 top
U35  74HC4050 LVL CONVERTER  [SO016]  74.68,97.79 0 top
U36  ARDUINO_R3_SHIELD  [UNO_R3_SHIELD]  60.71,73.66 0 top
U37  3.3V  [SOT23-5]  157.73,121.92 90 top
U38  VS1053  [LQFP-48]  141.22,110.49 180 top
U39  1.8V  [SC70]  157.73,114.3 90 top
U40  USD-SOCKET  [MICRO-SD-SOCKET-PP]  122.17,91.44 180 top
U41  74HC4050 LVL CONVERTER  [SO016]  128.52,97.79 0 top
U42  ARDUINO_R3_SHIELD  [UNO_R3_SHIELD]  114.55,73.66 0 top
U43  3.3V  [SOT23-5]  211.58,121.92 90 top
U44  VS1053  [LQFP-48]  195.07,110.49 180 top
U45  1.8V  [SC70]  211.58,114.3 90 top
U46  USD-SOCKET  [MICRO-SD-SOCKET-PP]  176.02,91.44 180 top
U47  74HC4050 LVL CONVERTER  [SO016]  182.37,97.79 0 top
U48  ARDUINO_R3_SHIELD  [UNO_R3_SHIELD]  168.4,73.66 0 top
U$1  FIDUCIAL1X2  [FIDUCIAL-1X2]  68.33,64.77 0 top
U$2  FIDUCIAL1X2  [FIDUCIAL-1X2]  111.51,16.51 0 top
U$3  LOGO-SFENEW  [SFE-NEW-WEBLOGO]  96.77,56.26 0 bottom
U$4  FIDUCIAL1X2  [FIDUCIAL-1X2]  14.48,64.77 0 top
U$5  FIDUCIAL1X2  [FIDUCIAL-1X2]  57.66,16.51 0 top
U$6  FIDUCIAL1X2  [FIDUCIAL-1X2]  122.17,64.77 0 top
U$7  FIDUCIAL1X2  [FIDUCIAL-1X2]  165.35,16.51 0 top
U$8  LOGO-SFENEW  [SFE-NEW-WEBLOGO]  42.93,56.26 0 bottom
U$9  LOGO-SFENEW  [SFE-NEW-WEBLOGO]  150.62,56.26 0 bottom
U$10  FIDUCIAL1X2  [FIDUCIAL-1X2]  176.02,64.77 0 top
U$11  FIDUCIAL1X2  [FIDUCIAL-1X2]  219.2,16.51 0 top
U$12  LOGO-SFENEW  [SFE-NEW-WEBLOGO]  204.47,56.26 0 bottom
U$13  FIDUCIAL1X2  [FIDUCIAL-1X2]  14.48,128.27 0 top
U$14  FIDUCIAL1X2  [FIDUCIAL-1X2]  57.66,80.01 0 top
U$15  LOGO-SFENEW  [SFE-NEW-WEBLOGO]  42.93,119.76 0 bottom
U$16  FIDUCIAL1X2  [FIDUCIAL-1X2]  68.33,128.27 0 top
U$17  FIDUCIAL1X2  [FIDUCIAL-1X2]  111.51,80.01 0 top
U$18  LOGO-SFENEW  [SFE-NEW-WEBLOGO]  96.77,119.76 0 bottom
U$19  FIDUCIAL1X2  [FIDUCIAL-1X2]  122.17,128.27 0 top
U$20  FIDUCIAL1X2  [FIDUCIAL-1X2]  165.35,80.01 0 top
U$21  LOGO-SFENEW  [SFE-NEW-WEBLOGO]  150.62,119.76 0 bottom
U$22  FIDUCIAL1X2  [FIDUCIAL-1X2]  176.02,128.27 0 top
U$23  FIDUCIAL1X2  [FIDUCIAL-1X2]  219.2,80.01 0 top
U$24  LOGO-SFENEW  [SFE-NEW-WEBLOGO]  204.47,119.76 0 bottom

## Library data of the parts
C1 C6 C17 C18 C22 C23 C37 C38 C42 C43 C57 C58 C62 C63 C77 C78 C82 C83 C97 C98 C102 C103 C117 C118 C122 C123 C137 C138 C142 C143 C157 C158 = SparkFun-Capacitors; PROD_ID: CAP-00811
C2 C5 C7 C13-C16 C21 C24 C32-C36 C41 C44 C52-C56 C61 C64 C72-C76 C81 C84 C92-C96 C101 C104 C112-C116 C121 C124 C132-C136 C141 C144 C152-C156 = SparkFun-Capacitors; PROD_ID: CAP-00810
C3 C8 C25 C26 C45 C46 C65 C66 C85 C86 C105 C106 C125 C126 C145 C146 = SparkFun-Capacitors; PROD_ID: CAP-07876
C4 C31 C51 C71 C91 C111 C131 C151 = SparkFun-Capacitors; PROD_ID: CAP-07884
C9 C27 C47 C67 C87 C107 C127 C147 = SparkFun-Capacitors; PROD_ID: CAP-00868
C10 C11 C28 C29 C48 C49 C68 C69 C88 C89 C108 C109 C128 C129 C148 C149 = SparkFun-Capacitors; PROD_ID: CAP-00867
C12 C30 C50 C70 C90 C110 C130 C150 = SparkFun-Capacitors; PROD_ID: CAP-08605
C19 C20 C39 C40 C59 C60 C79 C80 C99 C100 C119 C120 C139 C140 C159 C160 = SparkFun-Capacitors; PROD_ID: CAP-09633
E$1 E$4 E$5 LOGO1-LOGO16 = SparkFun-Aesthetics
J1-J8 JP3 JP4 JP6 JP8 JP10 JP12 JP14 JP16 Q1 Q6 Q11 Q16 Q21 Q26 Q31 Q36 SJ2-SJ6 SJ8-SJ10 SJ12-SJ14 SJ16-SJ18 SJ20-SJ22 SJ24-SJ26 SJ28-SJ30 SJ32 TP1-TP16 U6 U10 U16 U22 U28 U34 U40 U46 U$1-U$24 = SparkFun
JP1 JP2 JP5 JP7 JP9 JP11 JP13 JP15 = SparkFun-Connectors; PROD_ID: CONN-10353
LED1-LED8 = SparkFun-LED; PROD_ID: DIO-00819
Q2 Q3 Q7 Q8 Q12 Q13 Q17 Q18 Q22 Q23 Q27 Q28 Q32 Q33 Q37 Q38 = SparkFun-DiscreteSemi; PROD_ID: TRANS-08052
Q4 Q5 Q9 Q10 Q14 Q15 Q19 Q20 Q24 Q25 Q29 Q30 Q34 Q35 Q39 Q40 = SparkFun-DiscreteSemi; PROD_ID: TRANS-08049
R1 R26 R50 R74 R98 R122 R146 R170 = SparkFun-Resistors; PROD_ID: RES-07868
R2-R5 R10-R12 R24 R27-R29 R33-R36 R48 R51-R53 R57-R60 R72 R75-R77 R81-R84 R96 R99-R101 R105-R108 R120 R123-R125 R129-R132 R144 R147-R149 R153-R156 R168 R171-R173 R177-R180 R192 = SparkFun-Resistors; PROD_ID: RES-07828
R6 R7 R30 R31 R54 R55 R78 R79 R102 R103 R126 R127 R150 R151 R174 R175 = SparkFun-Resistors; PROD_ID: RES-07862
R8 R25 R49 R73 R97 R121 R145 R169 = SparkFun-Resistors; PROD_ID: RES-00818
R9 R32 R56 R80 R104 R128 R152 R176 = SparkFun-Resistors; PROD_ID: RES-09834
R13 R14 R23 R37 R38 R47 R61 R62 R71 R85 R86 R95 R109 R110 R119 R133 R134 R143 R157 R158 R167 R181 R182 R191 = SparkFun-Resistors; PROD_ID: RES-07856
R15-R20 R39-R44 R63-R68 R87-R92 R111-R116 R135-R140 R159-R164 R183-R188 = SparkFun-Resistors; PROD_ID: RES-00824
R21 R22 R45 R46 R69 R70 R93 R94 R117 R118 R141 R142 R165 R166 R189 R190 = SparkFun-Resistors; PROD_ID: RES-07869
S1-S8 = SparkFun-Electromechanical; PROD_ID: SWCH-08247
SJ1 SJ7 SJ11 SJ15 SJ19 SJ23 SJ27 SJ31 = SparkFun-Passives
U1 U5 U13 U19 U25 U31 U37 U43 = SparkFun-PowerIC; PROD_ID: VREG-00822
U2 U12 U18 U24 U30 U36 U42 U48 = SparkFun-Boards
U3 U8 U14 U20 U26 U32 U38 U44 = SparkFun-DigitalIC; PROD_ID: IC-08983
U4 U9 U15 U21 U27 U33 U39 U45 = SparkFun-PowerIC; PROD_ID: VREG-08428
U7 U11 U17 U23 U29 U35 U41 U47 = SparkFun-DigitalIC

## Nets
1.8V: C1.A C2.1 C16.1 TP2.P$1 U3.5 U3.7 U3.24 U3.31 U4.5
1.8V1: C23.A C24.1 C35.1 TP4.P$1 U8.5 U8.7 U8.24 U8.31 U9.5
1.8V2: C43.A C44.1 C55.1 TP6.P$1 U14.5 U14.7 U14.24 U14.31 U15.5
1.8V3: C63.A C64.1 C75.1 TP8.P$1 U20.5 U20.7 U20.24 U20.31 U21.5
1.8V4: C83.A C84.1 C95.1 TP10.P$1 U26.5 U26.7 U26.24 U26.31 U27.5
1.8V5: C103.A C104.1 C115.1 TP12.P$1 U32.5 U32.7 U32.24 U32.31 U33.5
1.8V6: C123.A C124.1 C135.1 TP14.P$1 U38.5 U38.7 U38.24 U38.31 U39.5
1.8V7: C143.A C144.1 C155.1 TP16.P$1 U44.5 U44.7 U44.24 U44.31 U45.5
3.3V: C5.1 C6.A C7.1 C13.1 C14.1 C15.1 Q2.2 Q3.2 R2.2 R8.2 R24.1 TP1.P$1 U1.5 U3.6 U3.14 U3.19 U3.32 U3.38 U3.43 U3.45 U4.1 U4.3 U6.4 U7.1
3.3V1: C21.1 C22.A C32.1 C33.1 C34.1 C36.1 Q7.2 Q8.2 R25.2 R27.2 R48.1 TP3.P$1 U5.5 U8.6 U8.14 U8.19 U8.32 U8.38 U8.43 U8.45 U9.1 U9.3 U10.4 U11.1
3.3V2: C41.1 C42.A C52.1 C53.1 C54.1 C56.1 Q12.2 Q13.2 R49.2 R51.2 R72.1 TP5.P$1 U13.5 U14.6 U14.14 U14.19 U14.32 U14.38 U14.43 U14.45 U15.1 U15.3 U16.4 U17.1
3.3V3: C61.1 C62.A C72.1 C73.1 C74.1 C76.1 Q17.2 Q18.2 R73.2 R75.2 R96.1 TP7.P$1 U19.5 U20.6 U20.14 U20.19 U20.32 U20.38 U20.43 U20.45 U21.1 U21.3 U22.4 U23.1
3.3V4: C81.1 C82.A C92.1 C93.1 C94.1 C96.1 Q22.2 Q23.2 R97.2 R99.2 R120.1 TP9.P$1 U25.5 U26.6 U26.14 U26.19 U26.32 U26.38 U26.43 U26.45 U27.1 U27.3 U28.4 U29.1
3.3V5: C101.1 C102.A C112.1 C113.1 C114.1 C116.1 Q27.2 Q28.2 R121.2 R123.2 R144.1 TP11.P$1 U31.5 U32.6 U32.14 U32.19 U32.32 U32.38 U32.43 U32.45 U33.1 U33.3 U34.4 U35.1
3.3V6: C121.1 C122.A C132.1 C133.1 C134.1 C136.1 Q32.2 Q33.2 R145.2 R147.2 R168.1 TP13.P$1 U37.5 U38.6 U38.14 U38.19 U38.32 U38.38 U38.43 U38.45 U39.1 U39.3 U40.4 U41.1
3.3V7: C141.1 C142.A C152.1 C153.1 C154.1 C156.1 Q37.2 Q38.2 R169.2 R171.2 R192.1 TP15.P$1 U43.5 U44.6 U44.14 U44.19 U44.32 U44.38 U44.43 U44.45 U45.1 U45.3 U46.4 U47.1
5V-GPIO1: SJ3.2 U2.D4
5V-GPIO2: SJ6.2 U12.D4
5V-GPIO3: SJ10.2 U18.D4
5V-GPIO4: SJ14.2 U24.D4
5V-GPIO5: SJ18.2 U30.D4
5V-GPIO6: SJ22.2 U36.D4
5V-GPIO7: SJ26.2 U42.D4
5V-GPIO8: SJ30.2 U48.D4
5V-MIDI-RX: SJ2.1 U2.D3
5V-MIDI-RX1: SJ5.1 U12.D3
5V-MIDI-RX2: SJ9.1 U18.D3
5V-MIDI-RX3: SJ13.1 U24.D3
5V-MIDI-RX4: SJ17.1 U30.D3
5V-MIDI-RX5: SJ21.1 U36.D3
5V-MIDI-RX6: SJ25.1 U42.D3
5V-MIDI-RX7: SJ29.1 U48.D3
5V-MOSI: J1.4 U2.D11 U7.3
5V-MOSI1: J2.4 U11.3 U12.D11
5V-MOSI2: J3.4 U17.3 U18.D11
5V-MOSI3: J4.4 U23.3 U24.D11
5V-MOSI4: J5.4 U29.3 U30.D11
5V-MOSI5: J6.4 U35.3 U36.D11
5V-MOSI6: J7.4 U41.3 U42.D11
5V-MOSI7: J8.4 U47.3 U48.D11
5V-MP3-CS: U2.D6 U7.9
5V-MP3-CS1: U11.9 U12.D6
5V-MP3-CS2: U17.9 U18.D6
5V-MP3-CS3: U23.9 U24.D6
5V-MP3-CS4: U29.9 U30.D6
5V-MP3-CS5: U35.9 U36.D6
5V-MP3-CS6: U41.9 U42.D6
5V-MP3-CS7: U47.9 U48.D6
5V-MP3-DCS: U2.D7 U7.11
5V-MP3-DCS1: U11.11 U12.D7
5V-MP3-DCS2: U17.11 U18.D7
5V-MP3-DCS3: U23.11 U24.D7
5V-MP3-DCS4: U29.11 U30.D7
5V-MP3-DCS5: U35.11 U36.D7
5V-MP3-DCS6: U41.11 U42.D7
5V-MP3-DCS7: U47.11 U48.D7
5V-MP3-RST: U2.D8 U7.14
5V-MP3-RST1: U11.14 U12.D8
5V-MP3-RST2: U17.14 U18.D8
5V-MP3-RST3: U23.14 U24.D8
5V-MP3-RST4: U29.14 U30.D8
5V-MP3-RST5: U35.14 U36.D8
5V-MP3-RST6: U41.14 U42.D8
5V-MP3-RST7: U47.14 U48.D8
5V-MUTE: SJ4.2 U2.D5
5V-MUTE1: SJ8.2 U12.D5
5V-MUTE2: SJ12.2 U18.D5
5V-MUTE3: SJ16.2 U24.D5
5V-MUTE4: SJ20.2 U30.D5
5V-MUTE5: SJ24.2 U36.D5
5V-MUTE6: SJ28.2 U42.D5
5V-MUTE7: SJ32.2 U48.D5
5V-SCK: J1.3 U2.D13 U7.7
5V-SCK1: J2.3 U11.7 U12.D13
5V-SCK2: J3.3 U17.7 U18.D13
5V-SCK3: J4.3 U23.7 U24.D13
5V-SCK4: J5.3 U29.7 U30.D13
5V-SCK5: J6.3 U35.7 U36.D13
5V-SCK6: J7.3 U41.7 U42.D13
5V-SCK7: J8.3 U47.7 U48.D13
5V-SD-CS: U2.D9 U7.5
5V-SD-CS1: U11.5 U12.D9
5V-SD-CS2: U17.5 U18.D9
5V-SD-CS3: U23.5 U24.D9
5V-SD-CS4: U29.5 U30.D9
5V-SD-CS5: U35.5 U36.D9
5V-SD-CS6: U41.5 U42.D9
5V-SD-CS7: U47.5 U48.D9
/MUTE: R17.1 R19.1 R23.1 R24.2
/MUTE1: R41.1 R43.1 R47.1 R48.2
/MUTE2: R65.1 R67.1 R71.1 R72.2
/MUTE3: R89.1 R91.1 R95.1 R96.2
/MUTE4: R113.1 R115.1 R119.1 R120.2
/MUTE5: R137.1 R139.1 R143.1 R144.2
/MUTE6: R161.1 R163.1 R167.1 R168.2
/MUTE7: R185.1 R187.1 R191.1 R192.2
ARST: S2.3 U2.RES
ARST1: S1.3 U12.RES
ARST2: S3.3 U18.RES
ARST3: S4.3 U24.RES
ARST4: S5.3 U30.RES
ARST5: S6.3 U36.RES
ARST6: S7.3 U42.RES
ARST7: S8.3 U48.RES
G1: R3.2 U3.9 U3.10 U3.11 U3.12
G2: R4.2 U3.25
G3: R28.2 U8.9 U8.10 U8.11 U8.12
G4: R35.2 U8.25
G5: R52.2 U14.9 U14.10 U14.11 U14.12
G6: R59.2 U14.25
G7: R76.2 U20.9 U20.10 U20.11 U20.12
G8: R83.2 U20.25
G9: R100.2 U26.9 U26.10 U26.11 U26.12
G10: R107.2 U26.25
G11: R124.2 U32.9 U32.10 U32.11 U32.12
G12: R131.2 U32.25
G13: R148.2 U38.9 U38.10 U38.11 U38.12
G14: R155.2 U38.25
G15: R172.2 U44.9 U44.10 U44.11 U44.12
G16: R179.2 U44.25
GBUF: R9.2 SJ1.1 U3.42
GBUF1: R32.2 SJ7.1 U8.42
GBUF2: R56.2 SJ11.1 U14.42
GBUF3: R80.2 SJ15.1 U20.42
GBUF4: R104.2 SJ19.1 U26.42
GBUF5: R128.2 SJ23.1 U32.42
GBUF6: R152.2 SJ27.1 U38.42
GBUF7: R176.2 SJ31.1 U44.42
GND: C1.C C2.2 C3.1 C4.2 C5.2 C6.C C7.2 C8.1 C9.1 C10.2 C11.2 C12.2 C13.2 C14.2 C15.2 C16.2 C19.2 C20.2 J1.6 LED1.C Q4.2 Q5.2 R3.1 R4.1 R5.1 R10.1 R11.1 R12.1 R15.2 R16.2 S2.1 SJ1.3 U1.2 U2.GND@0 U2.GND@1 U2.GND@2 U3.4 U3.16 U3.20 U3.21 U3.22 U3.35 U3.37 U3.40 U3.41 U3.47 U4.2 U6.6 U6.CD1 U6.CD2 U6.GND1 U6.GND3 U7.8
GND1: C21.2 C22.C C23.C C24.2 C25.1 C26.1 C27.1 C28.2 C29.2 C30.2 C31.2 C32.2 C33.2 C34.2 C35.2 C36.2 C39.2 C40.2 J2.6 LED2.C Q9.2 Q10.2 R28.1 R29.1 R33.1 R34.1 R35.1 R36.1 R39.2 R40.2 S1.1 SJ7.3 U5.2 U8.4 U8.16 U8.20 U8.21 U8.22 U8.35 U8.37 U8.40 U8.41 U8.47 U9.2 U10.6 U10.CD1 U10.CD2 U10.GND1 U10.GND3 U11.8 U12.GND@0 U12.GND@1 U12.GND@2
GND2: C41.2 C42.C C43.C C44.2 C45.1 C46.1 C47.1 C48.2 C49.2 C50.2 C51.2 C52.2 C53.2 C54.2 C55.2 C56.2 C59.2 C60.2 J3.6 LED3.C Q14.2 Q15.2 R52.1 R53.1 R57.1 R58.1 R59.1 R60.1 R63.2 R64.2 S3.1 SJ11.3 U13.2 U14.4 U14.16 U14.20 U14.21 U14.22 U14.35 U14.37 U14.40 U14.41 U14.47 U15.2 U16.6 U16.CD1 U16.CD2 U16.GND1 U16.GND3 U17.8 U18.GND@0 U18.GND@1 U18.GND@2
GND3: C61.2 C62.C C63.C C64.2 C65.1 C66.1 C67.1 C68.2 C69.2 C70.2 C71.2 C72.2 C73.2 C74.2 C75.2 C76.2 C79.2 C80.2 J4.6 LED4.C Q19.2 Q20.2 R76.1 R77.1 R81.1 R82.1 R83.1 R84.1 R87.2 R88.2 S4.1 SJ15.3 U19.2 U20.4 U20.16 U20.20 U20.21 U20.22 U20.35 U20.37 U20.40 U20.41 U20.47 U21.2 U22.6 U22.CD1 U22.CD2 U22.GND1 U22.GND3 U23.8 U24.GND@0 U24.GND@1 U24.GND@2
GND4: C81.2 C82.C C83.C C84.2 C85.1 C86.1 C87.1 C88.2 C89.2 C90.2 C91.2 C92.2 C93.2 C94.2 C95.2 C96.2 C99.2 C100.2 J5.6 LED5.C Q24.2 Q25.2 R100.1 R101.1 R105.1 R106.1 R107.1 R108.1 R111.2 R112.2 S5.1 SJ19.3 U25.2 U26.4 U26.16 U26.20 U26.21 U26.22 U26.35 U26.37 U26.40 U26.41 U26.47 U27.2 U28.6 U28.CD1 U28.CD2 U28.GND1 U28.GND3 U29.8 U30.GND@0 U30.GND@1 U30.GND@2
GND5: C101.2 C102.C C103.C C104.2 C105.1 C106.1 C107.1 C108.2 C109.2 C110.2 C111.2 C112.2 C113.2 C114.2 C115.2 C116.2 C119.2 C120.2 J6.6 LED6.C Q29.2 Q30.2 R124.1 R125.1 R129.1 R130.1 R131.1 R132.1 R135.2 R136.2 S6.1 SJ23.3 U31.2 U32.4 U32.16 U32.20 U32.21 U32.22 U32.35 U32.37 U32.40 U32.41 U32.47 U33.2 U34.6 U34.CD1 U34.CD2 U34.GND1 U34.GND3 U35.8 U36.GND@0 U36.GND@1 U36.GND@2
GND6: C121.2 C122.C C123.C C124.2 C125.1 C126.1 C127.1 C128.2 C129.2 C130.2 C131.2 C132.2 C133.2 C134.2 C135.2 C136.2 C139.2 C140.2 J7.6 LED7.C Q34.2 Q35.2 R148.1 R149.1 R153.1 R154.1 R155.1 R156.1 R159.2 R160.2 S7.1 SJ27.3 U37.2 U38.4 U38.16 U38.20 U38.21 U38.22 U38.35 U38.37 U38.40 U38.41 U38.47 U39.2 U40.6 U40.CD1 U40.CD2 U40.GND1 U40.GND3 U41.8 U42.GND@0 U42.GND@1 U42.GND@2
GND7: C141.2 C142.C C143.C C144.2 C145.1 C146.1 C147.1 C148.2 C149.2 C150.2 C151.2 C152.2 C153.2 C154.2 C155.2 C156.2 C159.2 C160.2 J8.6 LED8.C Q39.2 Q40.2 R172.1 R173.1 R177.1 R178.1 R179.1 R180.1 R183.2 R184.2 S8.1 SJ31.3 U43.2 U44.4 U44.16 U44.20 U44.21 U44.22 U44.35 U44.37 U44.40 U44.41 U44.47 U45.2 U46.6 U46.CD1 U46.CD2 U46.GND1 U46.GND3 U47.8 U48.GND@0 U48.GND@1 U48.GND@2
GPIO0: R11.2 U3.33
GPIO1: R10.2 R14.1 U3.34
GPIO2: R34.2 U8.33
GPIO3: R33.2 R38.1 U8.34
GPIO4: R12.2 U3.36
GPIO5: R36.2 U8.36
GPIO6: R58.2 U14.33
GPIO7: R57.2 R62.1 U14.34
GPIO8: R60.2 U14.36
GPIO9: R82.2 U20.33
GPIO10: R81.2 R86.1 U20.34
GPIO11: R84.2 U20.36
GPIO12: R106.2 U26.33
GPIO13: R105.2 R110.1 U26.34
GPIO14: R108.2 U26.36
GPIO15: R130.2 U32.33
GPIO16: R129.2 R134.1 U32.34
GPIO17: R132.2 U32.36
GPIO18: R154.2 U38.33
GPIO19: R153.2 R158.1 U38.34
GPIO20: R156.2 U38.36
GPIO21: R178.2 U44.33
GPIO22: R177.2 R182.1 U44.34
GPIO23: R180.2 U44.36
LEFT: R7.2 R21.2 U3.46
LEFT1: R31.2 R45.2 U8.46
LEFT2: R55.2 R69.2 U14.46
LEFT3: R79.2 R93.2 U20.46
LEFT4: R103.2 R117.2 U26.46
LEFT5: R127.2 R141.2 U32.46
LEFT6: R151.2 R165.2 U38.46
LEFT7: R175.2 R189.2 U44.46
MIDI-RX: R2.1 R13.2 U3.26
MIDI-RX1: R27.1 R37.2 U8.26
MIDI-RX2: R51.1 R61.2 U14.26
MIDI-RX3: R75.1 R85.2 U20.26
MIDI-RX4: R99.1 R109.2 U26.26
MIDI-RX5: R123.1 R133.2 U32.26
MIDI-RX6: R147.1 R157.2 U38.26
MIDI-RX7: R171.1 R181.2 U44.26
MISO: J1.1 U2.D12 U3.30 U6.7
MISO1: J2.1 U8.30 U10.7 U12.D12
MISO2: J3.1 U14.30 U16.7 U18.D12
MISO3: J4.1 U20.30 U22.7 U24.D12
MISO4: J5.1 U26.30 U28.7 U30.D12
MISO5: J6.1 U32.30 U34.7 U36.D12
MISO6: J7.1 U38.30 U40.7 U42.D12
MISO7: J8.1 U44.30 U46.7 U48.D12
MOSI: U3.29 U6.3 U7.2
MOSI1: U8.29 U10.3 U11.2
MOSI2: U14.29 U16.3 U17.2
MOSI3: U20.29 U22.3 U23.2
MOSI4: U26.29 U28.3 U29.2
MOSI5: U32.29 U34.3 U35.2
MOSI6: U38.29 U40.3 U41.2
MOSI7: U44.29 U46.3 U47.2
MP3-CS: U3.23 U7.10
MP3-CS1: U8.23 U11.10
MP3-CS2: U14.23 U17.10
MP3-CS3: U20.23 U23.10
MP3-CS4: U26.23 U29.10
MP3-CS5: U32.23 U35.10
MP3-CS6: U38.23 U41.10
MP3-CS7: U44.23 U47.10
MP3-DCS: U3.13 U7.12
MP3-DCS1: U8.13 U11.12
MP3-DCS2: U14.13 U17.12
MP3-DCS3: U20.13 U23.12
MP3-DCS4: U26.13 U29.12
MP3-DCS5: U32.13 U35.12
MP3-DCS6: U38.13 U41.12
MP3-DCS7: U44.13 U47.12
MP3-DREQ: U2.D2 U3.8
MP3-DREQ1: U8.8 U12.D2
MP3-DREQ2: U14.8 U18.D2
MP3-DREQ3: U20.8 U24.D2
MP3-DREQ4: U26.8 U30.D2
MP3-DREQ5: U32.8 U36.D2
MP3-DREQ6: U38.8 U42.D2
MP3-DREQ7: U44.8 U48.D2
MP3-RST: R5.2 U3.3 U7.15
MP3-RST1: R29.2 U8.3 U11.15
MP3-RST2: R53.2 U14.3 U17.15
MP3-RST3: R77.2 U20.3 U23.15
MP3-RST4: R101.2 U26.3 U29.15
MP3-RST5: R125.2 U32.3 U35.15
MP3-RST6: R149.2 U38.3 U41.15
MP3-RST7: R173.2 U44.3 U47.15
N$1: Q4.1 R20.2
N$2: C12.1 R9.1
N$3: C10.1 R6.1
N$4: R14.2 SJ3.1
N$5: C11.1 R7.1
N$6: LED1.A R8.1
N$7: Q2.3 R20.1
N$8: R13.1 SJ2.2
N$9: C3.2 Q1.3 R1.2 U3.18
N$10: C8.2 Q1.1 R1.1 U3.17
N$11: Q2.1 R19.2
N$12: Q5.1 R18.2
N$13: LED2.A R25.1
N$14: R23.2 SJ4.1
N$15: Q3.3 R18.1
N$16: Q3.1 R17.2
N$17: C18.A C20.1 R22.1
N$18: C25.2 Q6.3 R26.2 U8.18
N$19: C17.A C19.1 R21.1
N$20: C26.2 Q6.1 R26.1 U8.17
N$21: C30.1 R32.1
N$22: C29.1 R31.1
N$23: C28.1 R30.1
N$24: C31.1 U5.4
N$25: R37.1 SJ5.2
N$26: R38.2 SJ6.1
N$27: Q9.1 R44.2
N$28: Q7.3 R44.1
N$29: Q7.1 R43.2
N$30: R47.2 SJ8.1
N$31: Q10.1 R42.2
N$32: Q8.3 R42.1
N$33: Q8.1 R41.2
N$34: C38.A C40.1 R46.1
N$35: C37.A C39.1 R45.1
N$36: LED3.A R49.1
N$37: C45.2 Q11.3 R50.2 U14.18
N$38: C46.2 Q11.1 R50.1 U14.17
N$39: C50.1 R56.1
N$40: C49.1 R55.1
N$41: C48.1 R54.1
N$42: C51.1 U13.4
N$43: R61.1 SJ9.2
N$44: R62.2 SJ10.1
N$45: Q14.1 R68.2
N$46: Q12.3 R68.1
N$47: Q12.1 R67.2
N$48: R71.2 SJ12.1
N$49: Q15.1 R66.2
N$50: Q13.3 R66.1
N$51: Q13.1 R65.2
N$52: C58.A C60.1 R70.1
N$53: C57.A C59.1 R69.1
N$54: LED4.A R73.1
N$55: C65.2 Q16.3 R74.2 U20.18
N$56: C66.2 Q16.1 R74.1 U20.17
N$57: C70.1 R80.1
N$58: C69.1 R79.1
N$59: C68.1 R78.1
N$60: C71.1 U19.4
N$61: R85.1 SJ13.2
N$62: R86.2 SJ14.1
N$63: Q19.1 R92.2
N$64: Q17.3 R92.1
N$65: Q17.1 R91.2
N$66: R95.2 SJ16.1
N$67: Q20.1 R90.2
N$68: Q18.3 R90.1
N$69: Q18.1 R89.2
N$70: C4.1 U1.4
N$71: C78.A C80.1 R94.1
N$72: C77.A C79.1 R93.1
N$73: LED5.A R97.1
N$74: C85.2 Q21.3 R98.2 U26.18
N$75: C86.2 Q21.1 R98.1 U26.17
N$76: C90.1 R104.1
N$77: C89.1 R103.1
N$78: C88.1 R102.1
N$79: C91.1 U25.4
N$80: R109.1 SJ17.2
N$81: R110.2 SJ18.1
N$82: Q24.1 R116.2
N$83: Q22.3 R116.1
N$84: Q22.1 R115.2
N$85: R119.2 SJ20.1
N$86: Q25.1 R114.2
N$87: Q23.3 R114.1
N$88: Q23.1 R113.2
N$89: C98.A C100.1 R118.1
N$90: C97.A C99.1 R117.1
N$91: LED6.A R121.1
N$92: C105.2 Q26.3 R122.2 U32.18
N$93: C106.2 Q26.1 R122.1 U32.17
N$94: C110.1 R128.1
N$95: C109.1 R127.1
N$96: C108.1 R126.1
N$97: C111.1 U31.4
N$98: R133.1 SJ21.2
N$99: R134.2 SJ22.1
N$100: Q29.1 R140.2
N$101: Q27.3 R140.1
N$102: Q27.1 R139.2
N$103: R143.2 SJ24.1
N$104: Q30.1 R138.2
N$105: Q28.3 R138.1
N$106: Q28.1 R137.2
N$107: C118.A C120.1 R142.1
N$108: C117.A C119.1 R141.1
N$109: LED7.A R145.1
N$110: C125.2 Q31.3 R146.2 U38.18
N$111: C126.2 Q31.1 R146.1 U38.17
N$112: C130.1 R152.1
N$113: C129.1 R151.1
N$114: C128.1 R150.1
N$115: C131.1 U37.4
N$116: R157.1 SJ25.2
N$117: R158.2 SJ26.1
N$118: Q34.1 R164.2
N$119: Q32.3 R164.1
N$120: Q32.1 R163.2
N$121: R167.2 SJ28.1
N$122: Q35.1 R162.2
N$123: Q33.3 R162.1
N$124: Q33.1 R161.2
N$125: C138.A C140.1 R166.1
N$126: C137.A C139.1 R165.1
N$127: LED8.A R169.1
N$128: C145.2 Q36.3 R170.2 U44.18
N$129: C146.2 Q36.1 R170.1 U44.17
N$130: C150.1 R176.1
N$131: C149.1 R175.1
N$132: C148.1 R174.1
N$133: C151.1 U43.4
N$134: R181.1 SJ29.2
N$135: R182.2 SJ30.1
N$136: Q39.1 R188.2
N$137: Q37.3 R188.1
N$138: Q37.1 R187.2
N$139: R191.2 SJ32.1
N$140: Q40.1 R186.2
N$141: Q38.3 R186.1
N$142: Q38.1 R185.2
N$143: C158.A C160.1 R190.1
N$144: C157.A C159.1 R189.1
RCAP: C9.2 U3.44
RCAP1: C27.2 U8.44
RCAP2: C47.2 U14.44
RCAP3: C67.2 U20.44
RCAP4: C87.2 U26.44
RCAP5: C107.2 U32.44
RCAP6: C127.2 U38.44
RCAP7: C147.2 U44.44
RIGHT: R6.2 R22.2 U3.39
RIGHT1: R30.2 R46.2 U8.39
RIGHT2: R54.2 R70.2 U14.39
RIGHT3: R78.2 R94.2 U20.39
RIGHT4: R102.2 R118.2 U26.39
RIGHT5: R126.2 R142.2 U32.39
RIGHT6: R150.2 R166.2 U38.39
RIGHT7: R174.2 R190.2 U44.39
SCK: U3.28 U6.5 U7.6
SCK1: U8.28 U10.5 U11.6
SCK2: U14.28 U16.5 U17.6
SCK3: U20.28 U22.5 U23.6
SCK4: U26.28 U28.5 U29.6
SCK5: U32.28 U34.5 U35.6
SCK6: U38.28 U40.5 U41.6
SCK7: U44.28 U46.5 U47.6
SD-CS: U6.2 U7.4
SD-CS1: U10.2 U11.4
SD-CS2: U16.2 U17.4
SD-CS3: U22.2 U23.4
SD-CS4: U28.2 U29.4
SD-CS5: U34.2 U35.4
SD-CS6: U40.2 U41.4
SD-CS7: U46.2 U47.4
SPKR-GND: JP1.SLEEVE JP3.1 SJ1.2
SPKR-GND1: JP2.SLEEVE JP4.1 SJ7.2
SPKR-GND2: JP5.SLEEVE JP6.1 SJ11.2
SPKR-GND3: JP7.SLEEVE JP8.1 SJ15.2
SPKR-GND4: JP9.SLEEVE JP10.1 SJ19.2
SPKR-GND5: JP11.SLEEVE JP12.1 SJ23.2
SPKR-GND6: JP13.SLEEVE JP14.1 SJ27.2
SPKR-GND7: JP15.SLEEVE JP16.1 SJ31.2
SPKR-L: C17.C JP1.TIP JP3.3 Q5.3 R15.1
SPKR-L1: C37.C JP2.TIP JP4.3 Q10.3 R39.1
SPKR-L2: C57.C JP5.TIP JP6.3 Q15.3 R63.1
SPKR-L3: C77.C JP7.TIP JP8.3 Q20.3 R87.1
SPKR-L4: C97.C JP9.TIP JP10.3 Q25.3 R111.1
SPKR-L5: C117.C JP11.TIP JP12.3 Q30.3 R135.1
SPKR-L6: C137.C JP13.TIP JP14.3 Q35.3 R159.1
SPKR-L7: C157.C JP15.TIP JP16.3 Q40.3 R183.1
SPKR-R: C18.C JP1.RING JP3.2 Q4.3 R16.1
SPKR-R1: C38.C JP2.RING JP4.2 Q9.3 R40.1
SPKR-R2: C58.C JP5.RING JP6.2 Q14.3 R64.1
SPKR-R3: C78.C JP7.RING JP8.2 Q19.3 R88.1
SPKR-R4: C98.C JP9.RING JP10.2 Q24.3 R112.1
SPKR-R5: C118.C JP11.RING JP12.2 Q29.3 R136.1
SPKR-R6: C138.C JP13.RING JP14.2 Q34.3 R160.1
SPKR-R7: C158.C JP15.RING JP16.2 Q39.3 R184.1
VCC: J1.2 U1.1 U1.3 U2.5V
VCC1: J2.2 U5.1 U5.3 U12.5V
VCC2: J3.2 U13.1 U13.3 U18.5V
VCC3: J4.2 U19.1 U19.3 U24.5V
VCC4: J5.2 U25.1 U25.3 U30.5V
VCC5: J6.2 U31.1 U31.3 U36.5V
VCC6: J7.2 U37.1 U37.3 U42.5V
VCC7: J8.2 U43.1 U43.3 U48.5V

## Tracks (layer width: path | path; a pad name or v marks a point on that pad's centre or on a via)
1.8V  (via drill 0.51, 0.6)
  Top 0.254: 33.78,44.2 U3.31 33.78,41.27 33.53,41.02 C16.1 | 33.78,44.2 33.78,45.47 v33.53,45.72 | U3.24 33.73,44.24 33.78,44.2 | v34.8,48.26 34.28,48.78 U3.5 34.28,52.08 34.04,52.32 33.53,52.32 33.28,52.07 U3.7 | C1.A 48.64,46.86 49.19,47.41 C2.1 49.21,48.28 49.21,49.53 | U4.5 49.21,49.53 | 49.21,49.53 v47.5,49.53
  Bottom 0.254: TP2.P$1 33.53,36.83 v33.53,45.72 33.53,46.99 v34.8,48.26 34.8,50.8 36.07,52.07 45.59,52.07 46.23,51.44 46.23,50.17 46.86,49.53 v47.5,49.53
  other vias: 34.8,35.56
1.8V1  (via drill 0.51, 0.6)
  Top 0.254: 87.63,44.2 U8.31 87.63,41.27 87.38,41.02 C35.1 | 87.63,44.2 87.63,45.47 v87.38,45.72 | U8.24 87.58,44.24 87.63,44.2 | v88.65,48.26 88.13,48.78 U8.5 88.13,52.08 87.88,52.32 87.38,52.32 87.13,52.07 U8.7 | C23.A 102.49,46.86 103.04,47.41 C24.1 103.06,48.28 103.06,49.53 | U9.5 103.06,49.53 | 103.06,49.53 v101.35,49.53
  Bottom 0.254: TP4.P$1 87.38,36.83 v87.38,45.72 87.38,46.99 v88.65,48.26 88.65,50.8 89.92,52.07 99.44,52.07 100.08,51.44 100.08,50.17 100.71,49.53 v101.35,49.53
  other vias: 88.65,35.56
1.8V2  (via drill 0.51, 0.6)
  Top 0.254: 141.47,44.2 U14.31 141.47,41.27 141.22,41.02 C55.1 | 141.47,44.2 141.47,45.47 v141.22,45.72 | U14.24 141.43,44.24 141.47,44.2 | v142.49,48.26 141.97,48.78 U14.5 141.97,52.08 141.73,52.32 141.22,52.32 140.97,52.07 U14.7 | C43.A 156.33,46.86 156.88,47.41 C44.1 156.91,48.28 156.91,49.53 | U15.5 156.91,49.53 | 156.91,49.53 v155.19,49.53
  Bottom 0.254: TP6.P$1 141.22,36.83 v141.22,45.72 141.22,46.99 v142.49,48.26 142.49,50.8 143.76,52.07 153.29,52.07 153.92,51.44 153.92,50.17 154.56,49.53 v155.19,49.53
  other vias: 142.49,35.56
1.8V3  (via drill 0.51, 0.6)
  Top 0.254: 195.32,44.2 U20.31 195.32,41.27 195.07,41.02 C75.1 | 195.32,44.2 195.32,45.47 v195.07,45.72 | U20.24 195.28,44.24 195.32,44.2 | v196.34,48.26 195.82,48.78 U20.5 195.82,52.08 195.58,52.32 195.07,52.32 194.82,52.07 U20.7 | C63.A 210.18,46.86 210.73,47.41 C64.1 210.76,48.28 210.76,49.53 | U21.5 210.76,49.53 | 210.76,49.53 v209.04,49.53
  Bottom 0.254: TP8.P$1 195.07,36.83 v195.07,45.72 195.07,46.99 v196.34,48.26 196.34,50.8 197.61,52.07 207.14,52.07 207.77,51.44 207.77,50.17 208.41,49.53 v209.04,49.53
  other vias: 196.34,35.56
1.8V4  (via drill 0.51, 0.6)